# EAGLE board Nano_Qwiic_Shield-Panel (EAGLE 9.1.0), part 1 of 3
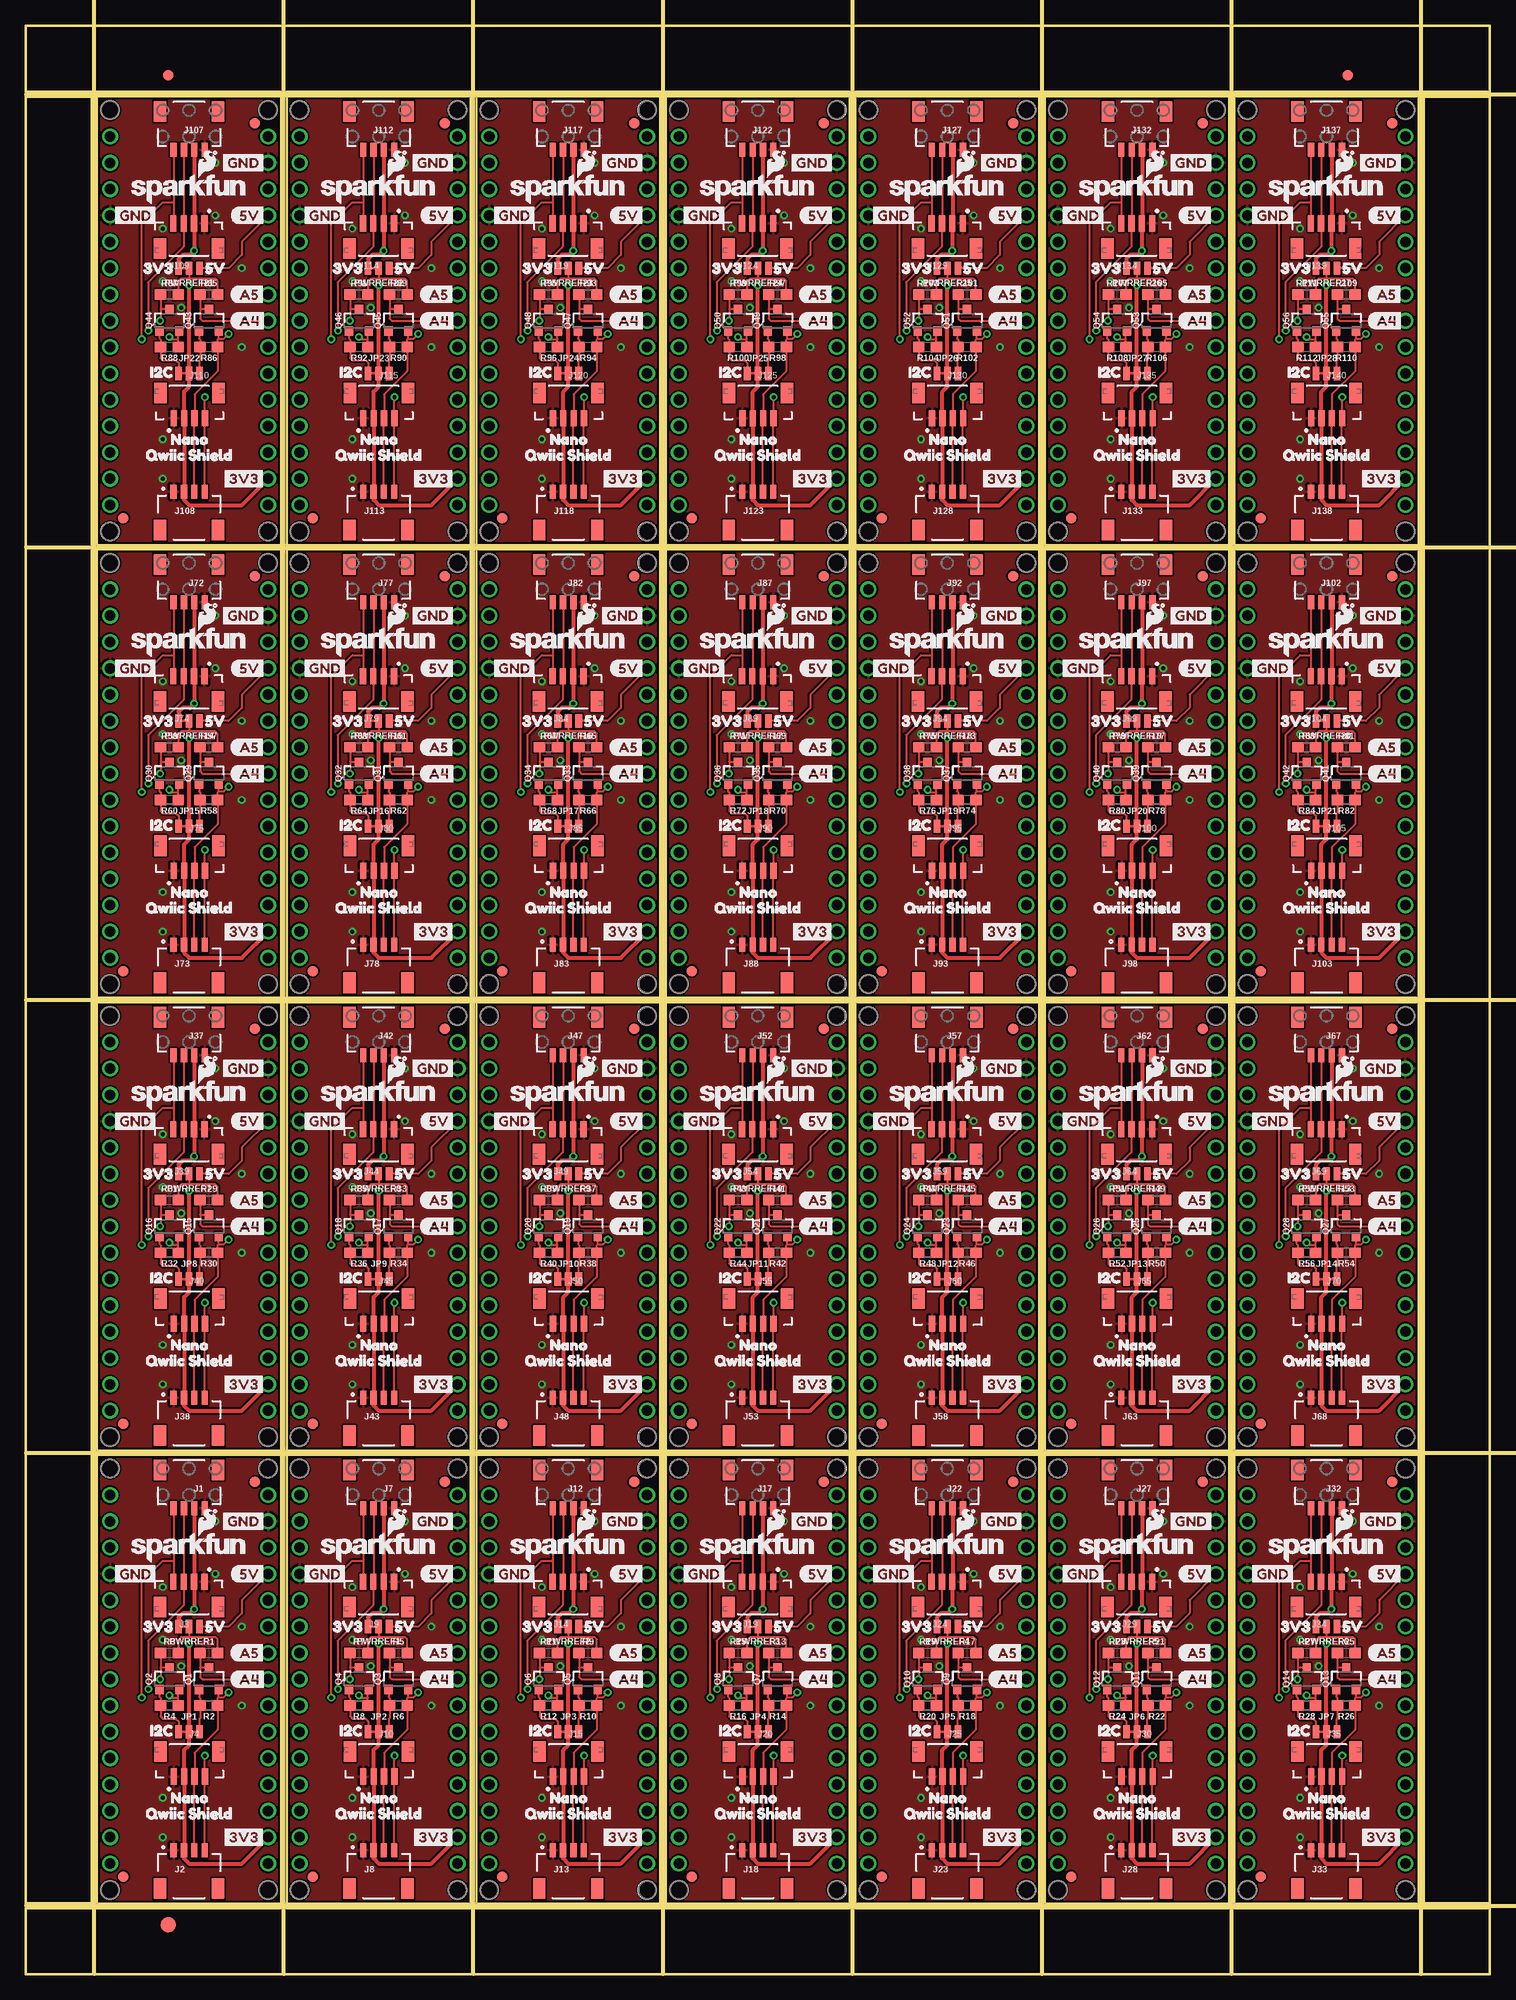
[diagram p0: board, top side]
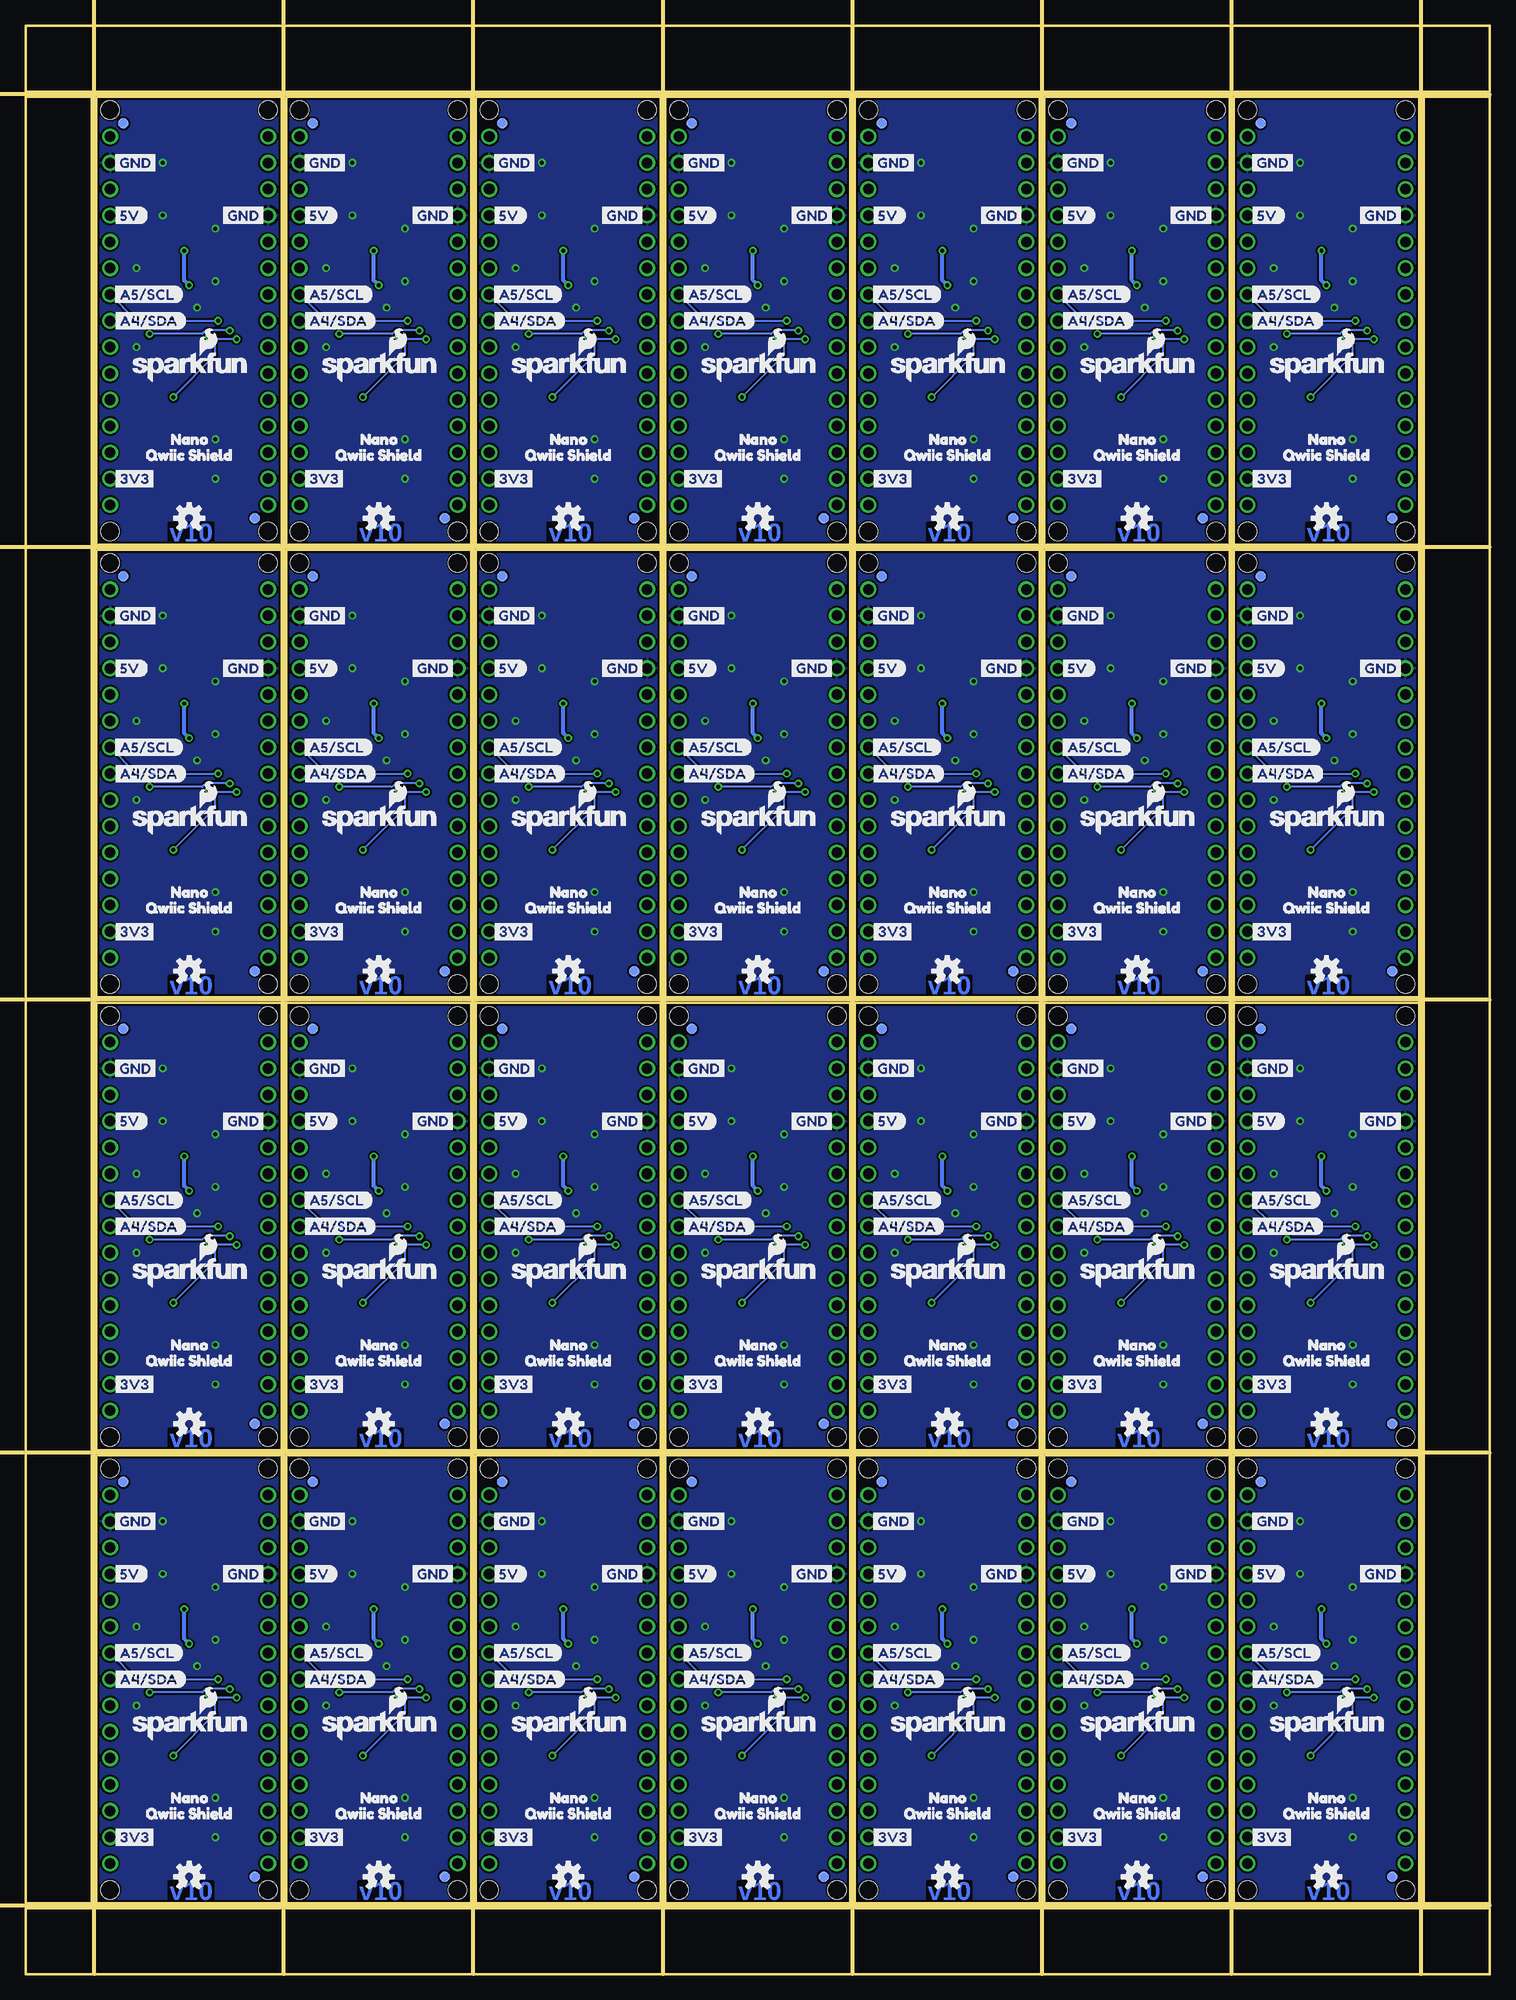
[diagram p1: board, bottom side, seen from below]

Size 141.22 x 187.96 mm. Coordinates in mm from the lower left corner, seen from the top.
Outline: 6.86,6.86 24.64,6.86 24.64,50.04 6.86,50.04 6.86,6.86
Outline: 25.15,6.86 42.93,6.86 42.93,50.04 25.15,50.04 25.15,6.86
Outline: 43.43,6.86 61.21,6.86 61.21,50.04 43.43,50.04 43.43,6.86
Outline: 61.72,6.86 79.5,6.86 79.5,50.04 61.72,50.04 61.72,6.86
Outline: 80.01,6.86 97.79,6.86 97.79,50.04 80.01,50.04 80.01,6.86
Outline: 98.3,6.86 116.08,6.86 116.08,50.04 98.3,50.04 98.3,6.86
Outline: 116.59,6.86 134.37,6.86 134.37,50.04 116.59,50.04 116.59,6.86
Outline: 6.86,50.55 24.64,50.55 24.64,93.73 6.86,93.73 6.86,50.55
Outline: 25.15,50.55 42.93,50.55 42.93,93.73 25.15,93.73 25.15,50.55
Outline: 43.43,50.55 61.21,50.55 61.21,93.73 43.43,93.73 43.43,50.55
Outline: 61.72,50.55 79.5,50.55 79.5,93.73 61.72,93.73 61.72,50.55
Outline: 80.01,50.55 97.79,50.55 97.79,93.73 80.01,93.73 80.01,50.55
Outline: 98.3,50.55 116.08,50.55 116.08,93.73 98.3,93.73 98.3,50.55
Outline: 116.59,50.55 134.37,50.55 134.37,93.73 116.59,93.73 116.59,50.55
Outline: 6.86,94.23 24.64,94.23 24.64,137.41 6.86,137.41 6.86,94.23
Outline: 25.15,94.23 42.93,94.23 42.93,137.41 25.15,137.41 25.15,94.23
Outline: 43.43,94.23 61.21,94.23 61.21,137.41 43.43,137.41 43.43,94.23
Outline: 61.72,94.23 79.5,94.23 79.5,137.41 61.72,137.41 61.72,94.23
Outline: 80.01,94.23 97.79,94.23 97.79,137.41 80.01,137.41 80.01,94.23
Outline: 98.3,94.23 116.08,94.23 116.08,137.41 98.3,137.41 98.3,94.23
Outline: 116.59,94.23 134.37,94.23 134.37,137.41 116.59,137.41 116.59,94.23
Outline: 6.86,137.92 24.64,137.92 24.64,181.1 6.86,181.1 6.86,137.92
Outline: 25.15,137.92 42.93,137.92 42.93,181.1 25.15,181.1 25.15,137.92
Outline: 43.43,137.92 61.21,137.92 61.21,181.1 43.43,181.1 43.43,137.92
Outline: 61.72,137.92 79.5,137.92 79.5,181.1 61.72,181.1 61.72,137.92
Outline: 80.01,137.92 97.79,137.92 97.79,181.1 80.01,181.1 80.01,137.92
Outline: 98.3,137.92 116.08,137.92 116.08,181.1 98.3,181.1 98.3,137.92
Outline: 116.59,137.92 134.37,137.92 134.37,181.1 116.59,181.1 116.59,137.92
Outline: 0,6.35 141.22,6.35 141.22,0 0,0 0,6.35
Outline: 134.87,181.1 141.22,181.1 141.22,6.86 134.87,6.86 134.87,181.1
Outline: 0,187.96 141.22,187.96 141.22,181.61 0,181.61 0,187.96
Outline: 0,181.1 6.35,181.1 6.35,6.86 0,6.86 0,181.1
Copper layers (1*16): Top 0.035mm / dielectric 1.5mm / Bottom 0.035mm
Design rules "SparkFun-2-layer-TIGHT": minimum track width 7mil, minimum drill 15mil, track to track 7mil, track to pad 7mil, pad to pad 7mil, via to via 7mil, smd to smd 7mil, copper to edge 7mil, drill to drill 7mil, minimum pad ring 7mil, minimum via ring 7mil, stop-mask expansion 4mil, vias tented up to drill 25mil, thermal gap 10mil
Holes 1.78 mm at 8.13,48.77 23.37,48.77 23.37,8.13 8.13,8.13 26.42,48.77 41.66,48.77 41.66,8.13 26.42,8.13 44.7,48.77 59.94,48.77 59.94,8.13 44.7,8.13 62.99,48.77 78.23,48.77 78.23,8.13 62.99,8.13 81.28,48.77 96.52,48.77 96.52,8.13 81.28,8.13 99.57,48.77 114.81,48.77 114.81,8.13 99.57,8.13 117.86,48.77 133.1,48.77 133.1,8.13 117.86,8.13 8.13,92.46 23.37,92.46 23.37,51.82 8.13,51.82 26.42,92.46 41.66,92.46 41.66,51.82 26.42,51.82 44.7,92.46 59.94,92.46 59.94,51.82 44.7,51.82 62.99,92.46 78.23,92.46 78.23,51.82 62.99,51.82 81.28,92.46 96.52,92.46 96.52,51.82 81.28,51.82 99.57,92.46 114.81,92.46 114.81,51.82 99.57,51.82 117.86,92.46 133.1,92.46 133.1,51.82 117.86,51.82 8.13,136.14 23.37,136.14 23.37,95.5 8.13,95.5 26.42,136.14 41.66,136.14 41.66,95.5 26.42,95.5 44.7,136.14 59.94,136.14 59.94,95.5 44.7,95.5 62.99,136.14 78.23,136.14 78.23,95.5 62.99,95.5 81.28,136.14 96.52,136.14 96.52,95.5 81.28,95.5 99.57,136.14 114.81,136.14 114.81,95.5 99.57,95.5 117.86,136.14 133.1,136.14 133.1,95.5 117.86,95.5 8.13,179.83 23.37,179.83 23.37,139.19 8.13,139.19 26.42,179.83 41.66,179.83 41.66,139.19 26.42,139.19 44.7,179.83 59.94,179.83 59.94,139.19 44.7,139.19 62.99,179.83 78.23,179.83 78.23,139.19 62.99,139.19 81.28,179.83 96.52,179.83 96.52,139.19 81.28,139.19 99.57,179.83 114.81,179.83 114.81,139.19 99.57,139.19 117.86,179.83 133.1,179.83 133.1,139.19 117.86,139.19
Milling: 13 lines

## Footprints (pad centres in the part's own frame; a part is rotated, then mirrored left to right if it is on the bottom)
FIDUCIAL-1X2 = smd 1 x 1: 1 0,0
FIDUCIAL-1.5X3 = smd 1.5 x 1.5: 1 0,0
JST04_1MM_RA = smd 0.6 x 1.35: 1 -1.5,0; 2 -0.5,0; 3 0.5,0; 4 1.5,0 | smd 1.2 x 2: NC1 2.8,-3.675; NC2 -2.8,-3.675
JST04_1MM_VERT = smd 0.6 x 1.55: 1 -1.478,0.775; 2 -0.478,0.775; 3 0.522,0.775; 4 1.522,0.775 | smd 1.2 x 2: NC1 -2.778,3.2; NC2 2.822,3.2
NANO = drill 1.016: 1 -7.62,17.78; 2 -7.62,15.24; 3 -7.62,12.7; 4 -7.62,10.16; 5 -7.62,7.62; 6 -7.62,5.08; 7 -7.62,2.54; 8 -7.62,0; 9 -7.62,-2.54; 10 -7.62,-5.08; 11 -7.62,-7.62; 12 -7.62,-10.16; 13 -7.62,-12.7; 14 -7.62,-15.24; 15 -7.62,-17.78; 16 7.62,-17.78; 17 7.62,-15.24; 18 7.62,-12.7; 19 7.62,-10.16; 20 7.62,-7.62; 21 7.62,-5.08; 22 7.62,-2.54; 23 7.62,0; 24 7.62,2.54; 25 7.62,5.08; 26 7.62,7.62; 27 7.62,10.16; 28 7.62,12.7; 29 7.62,15.24; 30 7.62,17.78
SMT-JUMPER_3_2-NC_TRACE_NO-SILK = smd 0.635 x 1.27: 1 -1.016,0; 2 0,0; 3 1.016,0
SMT-JUMPER_3_1-NC_TRACE_NO-SILK = smd 0.635 x 1.27: 1 -1.016,0; 2 0,0; 3 1.016,0
SOT23-3 = smd 0.8 x 0.9: 1 -0.95,-1; 2 0.95,-1; 3 0,1.1
0603 = smd 1.1 x 1: 1 -0.85,0; 2 0.85,0

## Placement (x,y rotation side)
E$1  [FIDUCIAL-1X2]  13.72,183.2 0 top
E$2  [FIDUCIAL-1X2]  127.51,183.2 0 top
E$3  [FIDUCIAL-1.5X3]  13.72,4.76 0 top
FD1  FIDUCIAL1X2  [FIDUCIAL-1X2]  9.4,9.4 0 top
FD2  FIDUCIAL1X2  [FIDUCIAL-1X2]  9.4,9.4 0 bottom
FD3  FIDUCIAL1X2  [FIDUCIAL-1X2]  22.1,47.5 0 top
FD4  FIDUCIAL1X2  [FIDUCIAL-1X2]  22.1,47.5 0 bottom
FD5  FIDUCIAL1X2  [FIDUCIAL-1X2]  27.69,9.4 0 top
FD6  FIDUCIAL1X2  [FIDUCIAL-1X2]  27.69,9.4 0 bottom
FD7  FIDUCIAL1X2  [FIDUCIAL-1X2]  40.39,47.5 0 top
FD8  FIDUCIAL1X2  [FIDUCIAL-1X2]  40.39,47.5 0 bottom
FD9  FIDUCIAL1X2  [FIDUCIAL-1X2]  45.97,9.4 0 top
FD10  FIDUCIAL1X2  [FIDUCIAL-1X2]  45.97,9.4 0 bottom
FD11  FIDUCIAL1X2  [FIDUCIAL-1X2]  58.67,47.5 0 top
FD12  FIDUCIAL1X2  [FIDUCIAL-1X2]  58.67,47.5 0 bottom
FD13  FIDUCIAL1X2  [FIDUCIAL-1X2]  64.26,9.4 0 top
FD14  FIDUCIAL1X2  [FIDUCIAL-1X2]  64.26,9.4 0 bottom
FD15  FIDUCIAL1X2  [FIDUCIAL-1X2]  76.96,47.5 0 top
FD16  FIDUCIAL1X2  [FIDUCIAL-1X2]  76.96,47.5 0 bottom
FD17  FIDUCIAL1X2  [FIDUCIAL-1X2]  82.55,9.4 0 top
FD18  FIDUCIAL1X2  [FIDUCIAL-1X2]  82.55,9.4 0 bottom
FD19  FIDUCIAL1X2  [FIDUCIAL-1X2]  95.25,47.5 0 top
FD20  FIDUCIAL1X2  [FIDUCIAL-1X2]  95.25,47.5 0 bottom
FD21  FIDUCIAL1X2  [FIDUCIAL-1X2]  100.84,9.4 0 top
FD22  FIDUCIAL1X2  [FIDUCIAL-1X2]  100.84,9.4 0 bottom
FD23  FIDUCIAL1X2  [FIDUCIAL-1X2]  113.54,47.5 0 top
FD24  FIDUCIAL1X2  [FIDUCIAL-1X2]  113.54,47.5 0 bottom
FD25  FIDUCIAL1X2  [FIDUCIAL-1X2]  119.13,9.4 0 top
FD26  FIDUCIAL1X2  [FIDUCIAL-1X2]  119.13,9.4 0 bottom
FD27  FIDUCIAL1X2  [FIDUCIAL-1X2]  131.83,47.5 0 top
FD28  FIDUCIAL1X2  [FIDUCIAL-1X2]  131.83,47.5 0 bottom
FD29  FIDUCIAL1X2  [FIDUCIAL-1X2]  9.4,53.09 0 top
FD30  FIDUCIAL1X2  [FIDUCIAL-1X2]  9.4,53.09 0 bottom
FD31  FIDUCIAL1X2  [FIDUCIAL-1X2]  22.1,91.19 0 top
FD32  FIDUCIAL1X2  [FIDUCIAL-1X2]  22.1,91.19 0 bottom
FD33  FIDUCIAL1X2  [FIDUCIAL-1X2]  27.69,53.09 0 top
FD34  FIDUCIAL1X2  [FIDUCIAL-1X2]  27.69,53.09 0 bottom
FD35  FIDUCIAL1X2  [FIDUCIAL-1X2]  40.39,91.19 0 top
FD36  FIDUCIAL1X2  [FIDUCIAL-1X2]  40.39,91.19 0 bottom
FD37  FIDUCIAL1X2  [FIDUCIAL-1X2]  45.97,53.09 0 top
FD38  FIDUCIAL1X2  [FIDUCIAL-1X2]  45.97,53.09 0 bottom
FD39  FIDUCIAL1X2  [FIDUCIAL-1X2]  58.67,91.19 0 top
FD40  FIDUCIAL1X2  [FIDUCIAL-1X2]  58.67,91.19 0 bottom
FD41  FIDUCIAL1X2  [FIDUCIAL-1X2]  64.26,53.09 0 top
FD42  FIDUCIAL1X2  [FIDUCIAL-1X2]  64.26,53.09 0 bottom
FD43  FIDUCIAL1X2  [FIDUCIAL-1X2]  76.96,91.19 0 top
FD44  FIDUCIAL1X2  [FIDUCIAL-1X2]  76.96,91.19 0 bottom
FD45  FIDUCIAL1X2  [FIDUCIAL-1X2]  82.55,53.09 0 top
FD46  FIDUCIAL1X2  [FIDUCIAL-1X2]  82.55,53.09 0 bottom
FD47  FIDUCIAL1X2  [FIDUCIAL-1X2]  95.25,91.19 0 top
FD48  FIDUCIAL1X2  [FIDUCIAL-1X2]  95.25,91.19 0 bottom
FD49  FIDUCIAL1X2  [FIDUCIAL-1X2]  100.84,53.09 0 top
FD50  FIDUCIAL1X2  [FIDUCIAL-1X2]  100.84,53.09 0 bottom
FD51  FIDUCIAL1X2  [FIDUCIAL-1X2]  113.54,91.19 0 top
FD52  FIDUCIAL1X2  [FIDUCIAL-1X2]  113.54,91.19 0 bottom
FD53  FIDUCIAL1X2  [FIDUCIAL-1X2]  119.13,53.09 0 top
FD54  FIDUCIAL1X2  [FIDUCIAL-1X2]  119.13,53.09 0 bottom
FD55  FIDUCIAL1X2  [FIDUCIAL-1X2]  131.83,91.19 0 top
FD56  FIDUCIAL1X2  [FIDUCIAL-1X2]  131.83,91.19 0 bottom
FD57  FIDUCIAL1X2  [FIDUCIAL-1X2]  9.4,96.77 0 top
FD58  FIDUCIAL1X2  [FIDUCIAL-1X2]  9.4,96.77 0 bottom
FD59  FIDUCIAL1X2  [FIDUCIAL-1X2]  22.1,134.87 0 top
FD60  FIDUCIAL1X2  [FIDUCIAL-1X2]  22.1,134.87 0 bottom
FD61  FIDUCIAL1X2  [FIDUCIAL-1X2]  27.69,96.77 0 top
FD62  FIDUCIAL1X2  [FIDUCIAL-1X2]  27.69,96.77 0 bottom
FD63  FIDUCIAL1X2  [FIDUCIAL-1X2]  40.39,134.87 0 top
FD64  FIDUCIAL1X2  [FIDUCIAL-1X2]  40.39,134.87 0 bottom
FD65  FIDUCIAL1X2  [FIDUCIAL-1X2]  45.97,96.77 0 top
FD66  FIDUCIAL1X2  [FIDUCIAL-1X2]  45.97,96.77 0 bottom
FD67  FIDUCIAL1X2  [FIDUCIAL-1X2]  58.67,134.87 0 top
FD68  FIDUCIAL1X2  [FIDUCIAL-1X2]  58.67,134.87 0 bottom
FD69  FIDUCIAL1X2  [FIDUCIAL-1X2]  64.26,96.77 0 top
FD70  FIDUCIAL1X2  [FIDUCIAL-1X2]  64.26,96.77 0 bottom
FD71  FIDUCIAL1X2  [FIDUCIAL-1X2]  76.96,134.87 0 top
FD72  FIDUCIAL1X2  [FIDUCIAL-1X2]  76.96,134.87 0 bottom
FD73  FIDUCIAL1X2  [FIDUCIAL-1X2]  82.55,96.77 0 top
FD74  FIDUCIAL1X2  [FIDUCIAL-1X2]  82.55,96.77 0 bottom
FD75  FIDUCIAL1X2  [FIDUCIAL-1X2]  95.25,134.87 0 top
FD76  FIDUCIAL1X2  [FIDUCIAL-1X2]  95.25,134.87 0 bottom
FD77  FIDUCIAL1X2  [FIDUCIAL-1X2]  100.84,96.77 0 top
FD78  FIDUCIAL1X2  [FIDUCIAL-1X2]  100.84,96.77 0 bottom
FD79  FIDUCIAL1X2  [FIDUCIAL-1X2]  113.54,134.87 0 top
FD80  FIDUCIAL1X2  [FIDUCIAL-1X2]  113.54,134.87 0 bottom
FD81  FIDUCIAL1X2  [FIDUCIAL-1X2]  119.13,96.77 0 top
FD82  FIDUCIAL1X2  [FIDUCIAL-1X2]  119.13,96.77 0 bottom
FD83  FIDUCIAL1X2  [FIDUCIAL-1X2]  131.83,134.87 0 top
FD84  FIDUCIAL1X2  [FIDUCIAL-1X2]  131.83,134.87 0 bottom
FD85  FIDUCIAL1X2  [FIDUCIAL-1X2]  9.4,140.46 0 top
FD86  FIDUCIAL1X2  [FIDUCIAL-1X2]  9.4,140.46 0 bottom
FD87  FIDUCIAL1X2  [FIDUCIAL-1X2]  22.1,178.56 0 top
FD88  FIDUCIAL1X2  [FIDUCIAL-1X2]  22.1,178.56 0 bottom
FD89  FIDUCIAL1X2  [FIDUCIAL-1X2]  27.69,140.46 0 top
FD90  FIDUCIAL1X2  [FIDUCIAL-1X2]  27.69,140.46 0 bottom
FD91  FIDUCIAL1X2  [FIDUCIAL-1X2]  40.39,178.56 0 top
FD92  FIDUCIAL1X2  [FIDUCIAL-1X2]  40.39,178.56 0 bottom
FD93  FIDUCIAL1X2  [FIDUCIAL-1X2]  45.97,140.46 0 top
FD94  FIDUCIAL1X2  [FIDUCIAL-1X2]  45.97,140.46 0 bottom
FD95  FIDUCIAL1X2  [FIDUCIAL-1X2]  58.67,178.56 0 top
FD96  FIDUCIAL1X2  [FIDUCIAL-1X2]  58.67,178.56 0 bottom
FD97  FIDUCIAL1X2  [FIDUCIAL-1X2]  64.26,140.46 0 top
FD98  FIDUCIAL1X2  [FIDUCIAL-1X2]  64.26,140.46 0 bottom
FD99  FIDUCIAL1X2  [FIDUCIAL-1X2]  76.96,178.56 0 top
FD100  FIDUCIAL1X2  [FIDUCIAL-1X2]  76.96,178.56 0 bottom
FD101  FIDUCIAL1X2  [FIDUCIAL-1X2]  82.55,140.46 0 top
FD102  FIDUCIAL1X2  [FIDUCIAL-1X2]  82.55,140.46 0 bottom
FD103  FIDUCIAL1X2  [FIDUCIAL-1X2]  95.25,178.56 0 top
FD104  FIDUCIAL1X2  [FIDUCIAL-1X2]  95.25,178.56 0 bottom
FD105  FIDUCIAL1X2  [FIDUCIAL-1X2]  100.84,140.46 0 top
FD106  FIDUCIAL1X2  [FIDUCIAL-1X2]  100.84,140.46 0 bottom
FD107  FIDUCIAL1X2  [FIDUCIAL-1X2]  113.54,178.56 0 top
FD108  FIDUCIAL1X2  [FIDUCIAL-1X2]  113.54,178.56 0 bottom
FD109  FIDUCIAL1X2  [FIDUCIAL-1X2]  119.13,140.46 0 top
FD110  FIDUCIAL1X2  [FIDUCIAL-1X2]  119.13,140.46 0 bottom
FD111  FIDUCIAL1X2  [FIDUCIAL-1X2]  131.83,178.56 0 top
FD112  FIDUCIAL1X2  [FIDUCIAL-1X2]  131.83,178.56 0 bottom
J1  QWIIC_RIGHT_ANGLE  [JST04_1MM_RA]  15.75,44.96 180 top
J2  QWIIC_RIGHT_ANGLE  [JST04_1MM_RA]  15.75,11.94 0 top
J3  Vertical Qwiic Connector  [JST04_1MM_VERT]  15.75,38.61 180 top
J4  Vertical Qwiic Connector  [JST04_1MM_VERT]  15.75,18.29 0 top
J5  NANO_FOOTPRINT  [NANO]  15.75,28.45 0 top
J6  NANO_FOOTPRINT  [NANO]  34.04,28.45 0 top
J7  QWIIC_RIGHT_ANGLE  [JST04_1MM_RA]  34.04,44.96 180 top
J8  QWIIC_RIGHT_ANGLE  [JST04_1MM_RA]  34.04,11.94 0 top
J9  Vertical Qwiic Connector  [JST04_1MM_VERT]  34.04,38.61 180 top
J10  Vertical Qwiic Connector  [JST04_1MM_VERT]  34.04,18.29 0 top
J11  NANO_FOOTPRINT  [NANO]  52.32,28.45 0 top
J12  QWIIC_RIGHT_ANGLE  [JST04_1MM_RA]  52.32,44.96 180 top
J13  QWIIC_RIGHT_ANGLE  [JST04_1MM_RA]  52.32,11.94 0 top
J14  Vertical Qwiic Connector  [JST04_1MM_VERT]  52.32,38.61 180 top
J15  Vertical Qwiic Connector  [JST04_1MM_VERT]  52.32,18.29 0 top
J16  NANO_FOOTPRINT  [NANO]  70.61,28.45 0 top
J17  QWIIC_RIGHT_ANGLE  [JST04_1MM_RA]  70.61,44.96 180 top
J18  QWIIC_RIGHT_ANGLE  [JST04_1MM_RA]  70.61,11.94 0 top
J19  Vertical Qwiic Connector  [JST04_1MM_VERT]  70.61,38.61 180 top
J20  Vertical Qwiic Connector  [JST04_1MM_VERT]  70.61,18.29 0 top
J21  NANO_FOOTPRINT  [NANO]  88.9,28.45 0 top
J22  QWIIC_RIGHT_ANGLE  [JST04_1MM_RA]  88.9,44.96 180 top
J23  QWIIC_RIGHT_ANGLE  [JST04_1MM_RA]  88.9,11.94 0 top
J24  Vertical Qwiic Connector  [JST04_1MM_VERT]  88.9,38.61 180 top
J25  Vertical Qwiic Connector  [JST04_1MM_VERT]  88.9,18.29 0 top
J26  NANO_FOOTPRINT  [NANO]  107.19,28.45 0 top
J27  QWIIC_RIGHT_ANGLE  [JST04_1MM_RA]  107.19,44.96 180 top
J28  QWIIC_RIGHT_ANGLE  [JST04_1MM_RA]  107.19,11.94 0 top
J29  Vertical Qwiic Connector  [JST04_1MM_VERT]  107.19,38.61 180 top
J30  Vertical Qwiic Connector  [JST04_1MM_VERT]  107.19,18.29 0 top
J31  NANO_FOOTPRINT  [NANO]  125.48,28.45 0 top
J32  QWIIC_RIGHT_ANGLE  [JST04_1MM_RA]  125.48,44.96 180 top
J33  QWIIC_RIGHT_ANGLE  [JST04_1MM_RA]  125.48,11.94 0 top
J34  Vertical Qwiic Connector  [JST04_1MM_VERT]  125.48,38.61 180 top
J35  Vertical Qwiic Connector  [JST04_1MM_VERT]  125.48,18.29 0 top
J36  NANO_FOOTPRINT  [NANO]  15.75,72.14 0 top
J37  QWIIC_RIGHT_ANGLE  [JST04_1MM_RA]  15.75,88.65 180 top
J38  QWIIC_RIGHT_ANGLE  [JST04_1MM_RA]  15.75,55.63 0 top
J39  Vertical Qwiic Connector  [JST04_1MM_VERT]  15.75,82.3 180 top
J40  Vertical Qwiic Connector  [JST04_1MM_VERT]  15.75,61.98 0 top
J41  NANO_FOOTPRINT  [NANO]  34.04,72.14 0 top
J42  QWIIC_RIGHT_ANGLE  [JST04_1MM_RA]  34.04,88.65 180 top
J43  QWIIC_RIGHT_ANGLE  [JST04_1MM_RA]  34.04,55.63 0 top
J44  Vertical Qwiic Connector  [JST04_1MM_VERT]  34.04,82.3 180 top
J45  Vertical Qwiic Connector  [JST04_1MM_VERT]  34.04,61.98 0 top
J46  NANO_FOOTPRINT  [NANO]  52.32,72.14 0 top
J47  QWIIC_RIGHT_ANGLE  [JST04_1MM_RA]  52.32,88.65 180 top
J48  QWIIC_RIGHT_ANGLE  [JST04_1MM_RA]  52.32,55.63 0 top
J49  Vertical Qwiic Connector  [JST04_1MM_VERT]  52.32,82.3 180 top
J50  Vertical Qwiic Connector  [JST04_1MM_VERT]  52.32,61.98 0 top
J51  NANO_FOOTPRINT  [NANO]  70.61,72.14 0 top
J52  QWIIC_RIGHT_ANGLE  [JST04_1MM_RA]  70.61,88.65 180 top
J53  QWIIC_RIGHT_ANGLE  [JST04_1MM_RA]  70.61,55.63 0 top
J54  Vertical Qwiic Connector  [JST04_1MM_VERT]  70.61,82.3 180 top
J55  Vertical Qwiic Connector  [JST04_1MM_VERT]  70.61,61.98 0 top
J56  NANO_FOOTPRINT  [NANO]  88.9,72.14 0 top
J57  QWIIC_RIGHT_ANGLE  [JST04_1MM_RA]  88.9,88.65 180 top
J58  QWIIC_RIGHT_ANGLE  [JST04_1MM_RA]  88.9,55.63 0 top
J59  Vertical Qwiic Connector  [JST04_1MM_VERT]  88.9,82.3 180 top
J60  Vertical Qwiic Connector  [JST04_1MM_VERT]  88.9,61.98 0 top
J61  NANO_FOOTPRINT  [NANO]  107.19,72.14 0 top
J62  QWIIC_RIGHT_ANGLE  [JST04_1MM_RA]  107.19,88.65 180 top
J63  QWIIC_RIGHT_ANGLE  [JST04_1MM_RA]  107.19,55.63 0 top
J64  Vertical Qwiic Connector  [JST04_1MM_VERT]  107.19,82.3 180 top
J65  Vertical Qwiic Connector  [JST04_1MM_VERT]  107.19,61.98 0 top
J66  NANO_FOOTPRINT  [NANO]  125.48,72.14 0 top
J67  QWIIC_RIGHT_ANGLE  [JST04_1MM_RA]  125.48,88.65 180 top
J68  QWIIC_RIGHT_ANGLE  [JST04_1MM_RA]  125.48,55.63 0 top
J69  Vertical Qwiic Connector  [JST04_1MM_VERT]  125.48,82.3 180 top
J70  Vertical Qwiic Connector  [JST04_1MM_VERT]  125.48,61.98 0 top
J71  NANO_FOOTPRINT  [NANO]  15.75,115.82 0 top
J72  QWIIC_RIGHT_ANGLE  [JST04_1MM_RA]  15.75,132.33 180 top
J73  QWIIC_RIGHT_ANGLE  [JST04_1MM_RA]  15.75,99.31 0 top
J74  Vertical Qwiic Connector  [JST04_1MM_VERT]  15.75,125.98 180 top
J75  Vertical Qwiic Connector  [JST04_1MM_VERT]  15.75,105.66 0 top
J76  NANO_FOOTPRINT  [NANO]  34.04,115.82 0 top
J77  QWIIC_RIGHT_ANGLE  [JST04_1MM_RA]  34.04,132.33 180 top
J78  QWIIC_RIGHT_ANGLE  [JST04_1MM_RA]  34.04,99.31 0 top
J79  Vertical Qwiic Connector  [JST04_1MM_VERT]  34.04,125.98 180 top
J80  Vertical Qwiic Connector  [JST04_1MM_VERT]  34.04,105.66 0 top
J81  NANO_FOOTPRINT  [NANO]  52.32,115.82 0 top
J82  QWIIC_RIGHT_ANGLE  [JST04_1MM_RA]  52.32,132.33 180 top
J83  QWIIC_RIGHT_ANGLE  [JST04_1MM_RA]  52.32,99.31 0 top
J84  Vertical Qwiic Connector  [JST04_1MM_VERT]  52.32,125.98 180 top
J85  Vertical Qwiic Connector  [JST04_1MM_VERT]  52.32,105.66 0 top
J86  NANO_FOOTPRINT  [NANO]  70.61,115.82 0 top
J87  QWIIC_RIGHT_ANGLE  [JST04_1MM_RA]  70.61,132.33 180 top
J88  QWIIC_RIGHT_ANGLE  [JST04_1MM_RA]  70.61,99.31 0 top
J89  Vertical Qwiic Connector  [JST04_1MM_VERT]  70.61,125.98 180 top
J90  Vertical Qwiic Connector  [JST04_1MM_VERT]  70.61,105.66 0 top
J91  NANO_FOOTPRINT  [NANO]  88.9,115.82 0 top
J92  QWIIC_RIGHT_ANGLE  [JST04_1MM_RA]  88.9,132.33 180 top
J93  QWIIC_RIGHT_ANGLE  [JST04_1MM_RA]  88.9,99.31 0 top
J94  Vertical Qwiic Connector  [JST04_1MM_VERT]  88.9,125.98 180 top
J95  Vertical Qwiic Connector  [JST04_1MM_VERT]  88.9,105.66 0 top
J96  NANO_FOOTPRINT  [NANO]  107.19,115.82 0 top
J97  QWIIC_RIGHT_ANGLE  [JST04_1MM_RA]  107.19,132.33 180 top
J98  QWIIC_RIGHT_ANGLE  [JST04_1MM_RA]  107.19,99.31 0 top
J99  Vertical Qwiic Connector  [JST04_1MM_VERT]  107.19,125.98 180 top
J100  Vertical Qwiic Connector  [JST04_1MM_VERT]  107.19,105.66 0 top
J101  NANO_FOOTPRINT  [NANO]  125.48,115.82 0 top
J102  QWIIC_RIGHT_ANGLE  [JST04_1MM_RA]  125.48,132.33 180 top
J103  QWIIC_RIGHT_ANGLE  [JST04_1MM_RA]  125.48,99.31 0 top
J104  Vertical Qwiic Connector  [JST04_1MM_VERT]  125.48,125.98 180 top
J105  Vertical Qwiic Connector  [JST04_1MM_VERT]  125.48,105.66 0 top
J106  NANO_FOOTPRINT  [NANO]  15.75,159.51 0 top
J107  QWIIC_RIGHT_ANGLE  [JST04_1MM_RA]  15.75,176.02 180 top
J108  QWIIC_RIGHT_ANGLE  [JST04_1MM_RA]  15.75,143 0 top
J109  Vertical Qwiic Connector  [JST04_1MM_VERT]  15.75,169.67 180 top
J110  Vertical Qwiic Connector  [JST04_1MM_VERT]  15.75,149.35 0 top
J111  NANO_FOOTPRINT  [NANO]  34.04,159.51 0 top
J112  QWIIC_RIGHT_ANGLE  [JST04_1MM_RA]  34.04,176.02 180 top
J113  QWIIC_RIGHT_ANGLE  [JST04_1MM_RA]  34.04,143 0 top
J114  Vertical Qwiic Connector  [JST04_1MM_VERT]  34.04,169.67 180 top
J115  Vertical Qwiic Connector  [JST04_1MM_VERT]  34.04,149.35 0 top
J116  NANO_FOOTPRINT  [NANO]  52.32,159.51 0 top
J117  QWIIC_RIGHT_ANGLE  [JST04_1MM_RA]  52.32,176.02 180 top
J118  QWIIC_RIGHT_ANGLE  [JST04_1MM_RA]  52.32,143 0 top
J119  Vertical Qwiic Connector  [JST04_1MM_VERT]  52.32,169.67 180 top
J120  Vertical Qwiic Connector  [JST04_1MM_VERT]  52.32,149.35 0 top
J121  NANO_FOOTPRINT  [NANO]  70.61,159.51 0 top
J122  QWIIC_RIGHT_ANGLE  [JST04_1MM_RA]  70.61,176.02 180 top
J123  QWIIC_RIGHT_ANGLE  [JST04_1MM_RA]  70.61,143 0 top
J124  Vertical Qwiic Connector  [JST04_1MM_VERT]  70.61,169.67 180 top
J125  Vertical Qwiic Connector  [JST04_1MM_VERT]  70.61,149.35 0 top
J126  NANO_FOOTPRINT  [NANO]  88.9,159.51 0 top
J127  QWIIC_RIGHT_ANGLE  [JST04_1MM_RA]  88.9,176.02 180 top
J128  QWIIC_RIGHT_ANGLE  [JST04_1MM_RA]  88.9,143 0 top
J129  Vertical Qwiic Connector  [JST04_1MM_VERT]  88.9,169.67 180 top
J130  Vertical Qwiic Connector  [JST04_1MM_VERT]  88.9,149.35 0 top
J131  NANO_FOOTPRINT  [NANO]  107.19,159.51 0 top
J132  QWIIC_RIGHT_ANGLE  [JST04_1MM_RA]  107.19,176.02 180 top
J133  QWIIC_RIGHT_ANGLE  [JST04_1MM_RA]  107.19,143 0 top
J134  Vertical Qwiic Connector  [JST04_1MM_VERT]  107.19,169.67 180 top
J135  Vertical Qwiic Connector  [JST04_1MM_VERT]  107.19,149.35 0 top
J136  NANO_FOOTPRINT  [NANO]  125.48,159.51 0 top
J137  QWIIC_RIGHT_ANGLE  [JST04_1MM_RA]  125.48,176.02 180 top
J138  QWIIC_RIGHT_ANGLE  [JST04_1MM_RA]  125.48,143 0 top
J139  Vertical Qwiic Connector  [JST04_1MM_VERT]  125.48,169.67 180 top
J140  Vertical Qwiic Connector  [JST04_1MM_VERT]  125.48,149.35 0 top
JP1  JUMPER-SMT_3_2-NC_TRACE_NO-SILK  [SMT-JUMPER_3_2-NC_TRACE_NO-SILK]  15.75,23.37 0 top
JP2  JUMPER-SMT_3_2-NC_TRACE_NO-SILK  [SMT-JUMPER_3_2-NC_TRACE_NO-SILK]  34.04,23.37 0 top
JP3  JUMPER-SMT_3_2-NC_TRACE_NO-SILK  [SMT-JUMPER_3_2-NC_TRACE_NO-SILK]  52.32,23.37 0 top
JP4  JUMPER-SMT_3_2-NC_TRACE_NO-SILK  [SMT-JUMPER_3_2-NC_TRACE_NO-SILK]  70.61,23.37 0 top
JP5  JUMPER-SMT_3_2-NC_TRACE_NO-SILK  [SMT-JUMPER_3_2-NC_TRACE_NO-SILK]  88.9,23.37 0 top
JP6  JUMPER-SMT_3_2-NC_TRACE_NO-SILK  [SMT-JUMPER_3_2-NC_TRACE_NO-SILK]  107.19,23.37 0 top
JP7  JUMPER-SMT_3_2-NC_TRACE_NO-SILK  [SMT-JUMPER_3_2-NC_TRACE_NO-SILK]  125.48,23.37 0 top
JP8  JUMPER-SMT_3_2-NC_TRACE_NO-SILK  [SMT-JUMPER_3_2-NC_TRACE_NO-SILK]  15.75,67.06 0 top
JP9  JUMPER-SMT_3_2-NC_TRACE_NO-SILK  [SMT-JUMPER_3_2-NC_TRACE_NO-SILK]  34.04,67.06 0 top
JP10  JUMPER-SMT_3_2-NC_TRACE_NO-SILK  [SMT-JUMPER_3_2-NC_TRACE_NO-SILK]  52.32,67.06 0 top
JP11  JUMPER-SMT_3_2-NC_TRACE_NO-SILK  [SMT-JUMPER_3_2-NC_TRACE_NO-SILK]  70.61,67.06 0 top
JP12  JUMPER-SMT_3_2-NC_TRACE_NO-SILK  [SMT-JUMPER_3_2-NC_TRACE_NO-SILK]  88.9,67.06 0 top
JP13  JUMPER-SMT_3_2-NC_TRACE_NO-SILK  [SMT-JUMPER_3_2-NC_TRACE_NO-SILK]  107.19,67.06 0 top
JP14  JUMPER-SMT_3_2-NC_TRACE_NO-SILK  [SMT-JUMPER_3_2-NC_TRACE_NO-SILK]  125.48,67.06 0 top
JP15  JUMPER-SMT_3_2-NC_TRACE_NO-SILK  [SMT-JUMPER_3_2-NC_TRACE_NO-SILK]  15.75,110.74 0 top
JP16  JUMPER-SMT_3_2-NC_TRACE_NO-SILK  [SMT-JUMPER_3_2-NC_TRACE_NO-SILK]  34.04,110.74 0 top
JP17  JUMPER-SMT_3_2-NC_TRACE_NO-SILK  [SMT-JUMPER_3_2-NC_TRACE_NO-SILK]  52.32,110.74 0 top
JP18  JUMPER-SMT_3_2-NC_TRACE_NO-SILK  [SMT-JUMPER_3_2-NC_TRACE_NO-SILK]  70.61,110.74 0 top
JP19  JUMPER-SMT_3_2-NC_TRACE_NO-SILK  [SMT-JUMPER_3_2-NC_TRACE_NO-SILK]  88.9,110.74 0 top
JP20  JUMPER-SMT_3_2-NC_TRACE_NO-SILK  [SMT-JUMPER_3_2-NC_TRACE_NO-SILK]  107.19,110.74 0 top
JP21  JUMPER-SMT_3_2-NC_TRACE_NO-SILK  [SMT-JUMPER_3_2-NC_TRACE_NO-SILK]  125.48,110.74 0 top
JP22  JUMPER-SMT_3_2-NC_TRACE_NO-SILK  [SMT-JUMPER_3_2-NC_TRACE_NO-SILK]  15.75,154.43 0 top
JP23  JUMPER-SMT_3_2-NC_TRACE_NO-SILK  [SMT-JUMPER_3_2-NC_TRACE_NO-SILK]  34.04,154.43 0 top
JP24  JUMPER-SMT_3_2-NC_TRACE_NO-SILK  [SMT-JUMPER_3_2-NC_TRACE_NO-SILK]  52.32,154.43 0 top
JP25  JUMPER-SMT_3_2-NC_TRACE_NO-SILK  [SMT-JUMPER_3_2-NC_TRACE_NO-SILK]  70.61,154.43 0 top
JP26  JUMPER-SMT_3_2-NC_TRACE_NO-SILK  [SMT-JUMPER_3_2-NC_TRACE_NO-SILK]  88.9,154.43 0 top
JP27  JUMPER-SMT_3_2-NC_TRACE_NO-SILK  [SMT-JUMPER_3_2-NC_TRACE_NO-SILK]  107.19,154.43 0 top
JP28  JUMPER-SMT_3_2-NC_TRACE_NO-SILK  [SMT-JUMPER_3_2-NC_TRACE_NO-SILK]  125.48,154.43 0 top
LOGO1  OSHW-LOGOS  [OSHW-LOGO-S]  15.75,9.4 0 bottom
LOGO2  SFE_LOGO_NAME_FLAME.1_INCH  [SFE_LOGO_NAME_FLAME_.1]  15.75,41.15 0 top
LOGO3  SFE_LOGO_NAME_FLAME.1_INCH  [SFE_LOGO_NAME_FLAME_.1]  15.62,24 0 bottom
LOGO4  OSHW-LOGOS  [OSHW-LOGO-S]  34.04,9.4 0 bottom
LOGO5  SFE_LOGO_NAME_FLAME.1_INCH  [SFE_LOGO_NAME_FLAME_.1]  34.04,41.15 0 top
LOGO6  SFE_LOGO_NAME_FLAME.1_INCH  [SFE_LOGO_NAME_FLAME_.1]  33.91,24 0 bottom
LOGO7  OSHW-LOGOS  [OSHW-LOGO-S]  52.32,9.4 0 bottom
LOGO8  SFE_LOGO_NAME_FLAME.1_INCH  [SFE_LOGO_NAME_FLAME_.1]  52.32,41.15 0 top
LOGO9  SFE_LOGO_NAME_FLAME.1_INCH  [SFE_LOGO_NAME_FLAME_.1]  52.2,24 0 bottom
LOGO10  OSHW-LOGOS  [OSHW-LOGO-S]  70.61,9.4 0 bottom
LOGO11  SFE_LOGO_NAME_FLAME.1_INCH  [SFE_LOGO_NAME_FLAME_.1]  70.61,41.15 0 top
LOGO12  SFE_LOGO_NAME_FLAME.1_INCH  [SFE_LOGO_NAME_FLAME_.1]  70.48,24 0 bottom
LOGO13  OSHW-LOGOS  [OSHW-LOGO-S]  88.9,9.4 0 bottom
LOGO14  SFE_LOGO_NAME_FLAME.1_INCH  [SFE_LOGO_NAME_FLAME_.1]  88.9,41.15 0 top
LOGO15  SFE_LOGO_NAME_FLAME.1_INCH  [SFE_LOGO_NAME_FLAME_.1]  88.77,24 0 bottom
LOGO16  OSHW-LOGOS  [OSHW-LOGO-S]  107.19,9.4 0 bottom
LOGO17  SFE_LOGO_NAME_FLAME.1_INCH  [SFE_LOGO_NAME_FLAME_.1]  107.19,41.15 0 top
LOGO18  SFE_LOGO_NAME_FLAME.1_INCH  [SFE_LOGO_NAME_FLAME_.1]  107.06,24 0 bottom
LOGO19  OSHW-LOGOS  [OSHW-LOGO-S]  125.48,9.4 0 bottom
LOGO20  SFE_LOGO_NAME_FLAME.1_INCH  [SFE_LOGO_NAME_FLAME_.1]  125.48,41.15 0 top
LOGO21  SFE_LOGO_NAME_FLAME.1_INCH  [SFE_LOGO_NAME_FLAME_.1]  125.35,24 0 bottom
LOGO22  OSHW-LOGOS  [OSHW-LOGO-S]  15.75,53.09 0 bottom
LOGO23  SFE_LOGO_NAME_FLAME.1_INCH  [SFE_LOGO_NAME_FLAME_.1]  15.75,84.84 0 top
LOGO24  SFE_LOGO_NAME_FLAME.1_INCH  [SFE_LOGO_NAME_FLAME_.1]  15.62,67.69 0 bottom
LOGO25  OSHW-LOGOS  [OSHW-LOGO-S]  34.04,53.09 0 bottom
LOGO26  SFE_LOGO_NAME_FLAME.1_INCH  [SFE_LOGO_NAME_FLAME_.1]  34.04,84.84 0 top
LOGO27  SFE_LOGO_NAME_FLAME.1_INCH  [SFE_LOGO_NAME_FLAME_.1]  33.91,67.69 0 bottom
LOGO28  OSHW-LOGOS  [OSHW-LOGO-S]  52.32,53.09 0 bottom
LOGO29  SFE_LOGO_NAME_FLAME.1_INCH  [SFE_LOGO_NAME_FLAME_.1]  52.32,84.84 0 top
LOGO30  SFE_LOGO_NAME_FLAME.1_INCH  [SFE_LOGO_NAME_FLAME_.1]  52.2,67.69 0 bottom
LOGO31  OSHW-LOGOS  [OSHW-LOGO-S]  70.61,53.09 0 bottom
LOGO32  SFE_LOGO_NAME_FLAME.1_INCH  [SFE_LOGO_NAME_FLAME_.1]  70.61,84.84 0 top
LOGO33  SFE_LOGO_NAME_FLAME.1_INCH  [SFE_LOGO_NAME_FLAME_.1]  70.48,67.69 0 bottom
LOGO34  OSHW-LOGOS  [OSHW-LOGO-S]  88.9,53.09 0 bottom
LOGO35  SFE_LOGO_NAME_FLAME.1_INCH  [SFE_LOGO_NAME_FLAME_.1]  88.9,84.84 0 top
LOGO36  SFE_LOGO_NAME_FLAME.1_INCH  [SFE_LOGO_NAME_FLAME_.1]  88.77,67.69 0 bottom
LOGO37  OSHW-LOGOS  [OSHW-LOGO-S]  107.19,53.09 0 bottom
LOGO38  SFE_LOGO_NAME_FLAME.1_INCH  [SFE_LOGO_NAME_FLAME_.1]  107.19,84.84 0 top
LOGO39  SFE_LOGO_NAME_FLAME.1_INCH  [SFE_LOGO_NAME_FLAME_.1]  107.06,67.69 0 bottom
LOGO40  OSHW-LOGOS  [OSHW-LOGO-S]  125.48,53.09 0 bottom
LOGO41  SFE_LOGO_NAME_FLAME.1_INCH  [SFE_LOGO_NAME_FLAME_.1]  125.48,84.84 0 top
LOGO42  SFE_LOGO_NAME_FLAME.1_INCH  [SFE_LOGO_NAME_FLAME_.1]  125.35,67.69 0 bottom
LOGO43  OSHW-LOGOS  [OSHW-LOGO-S]  15.75,96.77 0 bottom
LOGO44  SFE_LOGO_NAME_FLAME.1_INCH  [SFE_LOGO_NAME_FLAME_.1]  15.75,128.52 0 top
LOGO45  SFE_LOGO_NAME_FLAME.1_INCH  [SFE_LOGO_NAME_FLAME_.1]  15.62,111.38 0 bottom
LOGO46  OSHW-LOGOS  [OSHW-LOGO-S]  34.04,96.77 0 bottom
LOGO47  SFE_LOGO_NAME_FLAME.1_INCH  [SFE_LOGO_NAME_FLAME_.1]  34.04,128.52 0 top
LOGO48  SFE_LOGO_NAME_FLAME.1_INCH  [SFE_LOGO_NAME_FLAME_.1]  33.91,111.38 0 bottom
LOGO49  OSHW-LOGOS  [OSHW-LOGO-S]  52.32,96.77 0 bottom
LOGO50  SFE_LOGO_NAME_FLAME.1_INCH  [SFE_LOGO_NAME_FLAME_.1]  52.32,128.52 0 top
LOGO51  SFE_LOGO_NAME_FLAME.1_INCH  [SFE_LOGO_NAME_FLAME_.1]  52.2,111.38 0 bottom
LOGO52  OSHW-LOGOS  [OSHW-LOGO-S]  70.61,96.77 0 bottom
LOGO53  SFE_LOGO_NAME_FLAME.1_INCH  [SFE_LOGO_NAME_FLAME_.1]  70.61,128.52 0 top
LOGO54  SFE_LOGO_NAME_FLAME.1_INCH  [SFE_LOGO_NAME_FLAME_.1]  70.48,111.38 0 bottom
LOGO55  OSHW-LOGOS  [OSHW-LOGO-S]  88.9,96.77 0 bottom
LOGO56  SFE_LOGO_NAME_FLAME.1_INCH  [SFE_LOGO_NAME_FLAME_.1]  88.9,128.52 0 top
LOGO57  SFE_LOGO_NAME_FLAME.1_INCH  [SFE_LOGO_NAME_FLAME_.1]  88.77,111.38 0 bottom
LOGO58  OSHW-LOGOS  [OSHW-LOGO-S]  107.19,96.77 0 bottom
LOGO59  SFE_LOGO_NAME_FLAME.1_INCH  [SFE_LOGO_NAME_FLAME_.1]  107.19,128.52 0 top
LOGO60  SFE_LOGO_NAME_FLAME.1_INCH  [SFE_LOGO_NAME_FLAME_.1]  107.06,111.38 0 bottom
LOGO61  OSHW-LOGOS  [OSHW-LOGO-S]  125.48,96.77 0 bottom
LOGO62  SFE_LOGO_NAME_FLAME.1_INCH  [SFE_LOGO_NAME_FLAME_.1]  125.48,128.52 0 top
LOGO63  SFE_LOGO_NAME_FLAME.1_INCH  [SFE_LOGO_NAME_FLAME_.1]  125.35,111.38 0 bottom
LOGO64  OSHW-LOGOS  [OSHW-LOGO-S]  15.75,140.46 0 bottom
LOGO65  SFE_LOGO_NAME_FLAME.1_INCH  [SFE_LOGO_NAME_FLAME_.1]  15.75,172.21 0 top
LOGO66  SFE_LOGO_NAME_FLAME.1_INCH  [SFE_LOGO_NAME_FLAME_.1]  15.62,155.07 0 bottom
LOGO67  OSHW-LOGOS  [OSHW-LOGO-S]  34.04,140.46 0 bottom
LOGO68  SFE_LOGO_NAME_FLAME.1_INCH  [SFE_LOGO_NAME_FLAME_.1]  34.04,172.21 0 top
LOGO69  SFE_LOGO_NAME_FLAME.1_INCH  [SFE_LOGO_NAME_FLAME_.1]  33.91,155.07 0 bottom
LOGO70  OSHW-LOGOS  [OSHW-LOGO-S]  52.32,140.46 0 bottom
LOGO71  SFE_LOGO_NAME_FLAME.1_INCH  [SFE_LOGO_NAME_FLAME_.1]  52.32,172.21 0 top
LOGO72  SFE_LOGO_NAME_FLAME.1_INCH  [SFE_LOGO_NAME_FLAME_.1]  52.2,155.07 0 bottom
LOGO73  OSHW-LOGOS  [OSHW-LOGO-S]  70.61,140.46 0 bottom
LOGO74  SFE_LOGO_NAME_FLAME.1_INCH  [SFE_LOGO_NAME_FLAME_.1]  70.61,172.21 0 top
LOGO75  SFE_LOGO_NAME_FLAME.1_INCH  [SFE_LOGO_NAME_FLAME_.1]  70.48,155.07 0 bottom
LOGO76  OSHW-LOGOS  [OSHW-LOGO-S]  88.9,140.46 0 bottom
LOGO77  SFE_LOGO_NAME_FLAME.1_INCH  [SFE_LOGO_NAME_FLAME_.1]  88.9,172.21 0 top
LOGO78  SFE_LOGO_NAME_FLAME.1_INCH  [SFE_LOGO_NAME_FLAME_.1]  88.77,155.07 0 bottom
LOGO79  OSHW-LOGOS  [OSHW-LOGO-S]  107.19,140.46 0 bottom
LOGO80  SFE_LOGO_NAME_FLAME.1_INCH  [SFE_LOGO_NAME_FLAME_.1]  107.19,172.21 0 top
LOGO81  SFE_LOGO_NAME_FLAME.1_INCH  [SFE_LOGO_NAME_FLAME_.1]  107.06,155.07 0 bottom
LOGO82  OSHW-LOGOS  [OSHW-LOGO-S]  125.48,140.46 0 bottom
LOGO83  SFE_LOGO_NAME_FLAME.1_INCH  [SFE_LOGO_NAME_FLAME_.1]  125.48,172.21 0 top
LOGO84  SFE_LOGO_NAME_FLAME.1_INCH  [SFE_LOGO_NAME_FLAME_.1]  125.35,155.07 0 bottom
PWRREF  JUMPER-SMT_3_1-NC_TRACE_NO-SILK  [SMT-JUMPER_3_1-NC_TRACE_NO-SILK]  15.75,33.53 180 top
PWRREF1  JUMPER-SMT_3_1-NC_TRACE_NO-SILK  [SMT-JUMPER_3_1-NC_TRACE_NO-SILK]  34.04,33.53 180 top
PWRREF2  JUMPER-SMT_3_1-NC_TRACE_NO-SILK  [SMT-JUMPER_3_1-NC_TRACE_NO-SILK]  52.32,33.53 180 top
PWRREF3  JUMPER-SMT_3_1-NC_TRACE_NO-SILK  [SMT-JUMPER_3_1-NC_TRACE_NO-SILK]  70.61,33.53 180 top
PWRREF4  JUMPER-SMT_3_1-NC_TRACE_NO-SILK  [SMT-JUMPER_3_1-NC_TRACE_NO-SILK]  88.9,33.53 180 top
PWRREF5  JUMPER-SMT_3_1-NC_TRACE_NO-SILK  [SMT-JUMPER_3_1-NC_TRACE_NO-SILK]  107.19,33.53 180 top
PWRREF6  JUMPER-SMT_3_1-NC_TRACE_NO-SILK  [SMT-JUMPER_3_1-NC_TRACE_NO-SILK]  125.48,33.53 180 top
PWRREF7  JUMPER-SMT_3_1-NC_TRACE_NO-SILK  [SMT-JUMPER_3_1-NC_TRACE_NO-SILK]  15.75,77.22 180 top
PWRREF8  JUMPER-SMT_3_1-NC_TRACE_NO-SILK  [SMT-JUMPER_3_1-NC_TRACE_NO-SILK]  34.04,77.22 180 top
PWRREF9  JUMPER-SMT_3_1-NC_TRACE_NO-SILK  [SMT-JUMPER_3_1-NC_TRACE_NO-SILK]  52.32,77.22 180 top
PWRREF10  JUMPER-SMT_3_1-NC_TRACE_NO-SILK  [SMT-JUMPER_3_1-NC_TRACE_NO-SILK]  70.61,77.22 180 top
PWRREF11  JUMPER-SMT_3_1-NC_TRACE_NO-SILK  [SMT-JUMPER_3_1-NC_TRACE_NO-SILK]  88.9,77.22 180 top
PWRREF12  JUMPER-SMT_3_1-NC_TRACE_NO-SILK  [SMT-JUMPER_3_1-NC_TRACE_NO-SILK]  107.19,77.22 180 top
PWRREF13  JUMPER-SMT_3_1-NC_TRACE_NO-SILK  [SMT-JUMPER_3_1-NC_TRACE_NO-SILK]  125.48,77.22 180 top
PWRREF14  JUMPER-SMT_3_1-NC_TRACE_NO-SILK  [SMT-JUMPER_3_1-NC_TRACE_NO-SILK]  15.75,120.9 180 top
PWRREF15  JUMPER-SMT_3_1-NC_TRACE_NO-SILK  [SMT-JUMPER_3_1-NC_TRACE_NO-SILK]  34.04,120.9 180 top
PWRREF16  JUMPER-SMT_3_1-NC_TRACE_NO-SILK  [SMT-JUMPER_3_1-NC_TRACE_NO-SILK]  52.32,120.9 180 top
PWRREF17  JUMPER-SMT_3_1-NC_TRACE_NO-SILK  [SMT-JUMPER_3_1-NC_TRACE_NO-SILK]  70.61,120.9 180 top
PWRREF18  JUMPER-SMT_3_1-NC_TRACE_NO-SILK  [SMT-JUMPER_3_1-NC_TRACE_NO-SILK]  88.9,120.9 180 top
PWRREF19  JUMPER-SMT_3_1-NC_TRACE_NO-SILK  [SMT-JUMPER_3_1-NC_TRACE_NO-SILK]  107.19,120.9 180 top
PWRREF20  JUMPER-SMT_3_1-NC_TRACE_NO-SILK  [SMT-JUMPER_3_1-NC_TRACE_NO-SILK]  125.48,120.9 180 top
PWRREF21  JUMPER-SMT_3_1-NC_TRACE_NO-SILK  [SMT-JUMPER_3_1-NC_TRACE_NO-SILK]  15.75,164.59 180 top
PWRREF22  JUMPER-SMT_3_1-NC_TRACE_NO-SILK  [SMT-JUMPER_3_1-NC_TRACE_NO-SILK]  34.04,164.59 180 top
PWRREF23  JUMPER-SMT_3_1-NC_TRACE_NO-SILK  [SMT-JUMPER_3_1-NC_TRACE_NO-SILK]  52.32,164.59 180 top
PWRREF24  JUMPER-SMT_3_1-NC_TRACE_NO-SILK  [SMT-JUMPER_3_1-NC_TRACE_NO-SILK]  70.61,164.59 180 top
PWRREF25  JUMPER-SMT_3_1-NC_TRACE_NO-SILK  [SMT-JUMPER_3_1-NC_TRACE_NO-SILK]  88.9,164.59 180 top
PWRREF26  JUMPER-SMT_3_1-NC_TRACE_NO-SILK  [SMT-JUMPER_3_1-NC_TRACE_NO-SILK]  107.19,164.59 180 top
PWRREF27  JUMPER-SMT_3_1-NC_TRACE_NO-SILK  [SMT-JUMPER_3_1-NC_TRACE_NO-SILK]  125.48,164.59 180 top
Q1  220mA/50V/3.5Ω  [SOT23-3]  17.65,28.45 0 top
Q2  220mA/50V/3.5Ω  [SOT23-3]  13.84,28.45 0 top
Q3  220mA/50V/3.5Ω  [SOT23-3]  35.94,28.45 0 top
Q4  220mA/50V/3.5Ω  [SOT23-3]  32.13,28.45 0 top
Q5  220mA/50V/3.5Ω  [SOT23-3]  54.23,28.45 0 top
Q6  220mA/50V/3.5Ω  [SOT23-3]  50.42,28.45 0 top
Q7  220mA/50V/3.5Ω  [SOT23-3]  72.52,28.45 0 top
Q8  220mA/50V/3.5Ω  [SOT23-3]  68.71,28.45 0 top
Q9  220mA/50V/3.5Ω  [SOT23-3]  90.81,28.45 0 top
Q10  220mA/50V/3.5Ω  [SOT23-3]  87,28.45 0 top
Q11  220mA/50V/3.5Ω  [SOT23-3]  109.09,28.45 0 top
Q12  220mA/50V/3.5Ω  [SOT23-3]  105.28,28.45 0 top
Q13  220mA/50V/3.5Ω  [SOT23-3]  127.38,28.45 0 top
Q14  220mA/50V/3.5Ω  [SOT23-3]  123.57,28.45 0 top
Q15  220mA/50V/3.5Ω  [SOT23-3]  17.65,72.14 0 top
Q16  220mA/50V/3.5Ω  [SOT23-3]  13.84,72.14 0 top
Q17  220mA/50V/3.5Ω  [SOT23-3]  35.94,72.14 0 top
Q18  220mA/50V/3.5Ω  [SOT23-3]  32.13,72.14 0 top
Q19  220mA/50V/3.5Ω  [SOT23-3]  54.23,72.14 0 top
Q20  220mA/50V/3.5Ω  [SOT23-3]  50.42,72.14 0 top
Q21  220mA/50V/3.5Ω  [SOT23-3]  72.52,72.14 0 top
Q22  220mA/50V/3.5Ω  [SOT23-3]  68.71,72.14 0 top
Q23  220mA/50V/3.5Ω  [SOT23-3]  90.81,72.14 0 top
Q24  220mA/50V/3.5Ω  [SOT23-3]  87,72.14 0 top
Q25  220mA/50V/3.5Ω  [SOT23-3]  109.09,72.14 0 top
Q26  220mA/50V/3.5Ω  [SOT23-3]  105.28,72.14 0 top
Q27  220mA/50V/3.5Ω  [SOT23-3]  127.38,72.14 0 top
Q28  220mA/50V/3.5Ω  [SOT23-3]  123.57,72.14 0 top
Q29  220mA/50V/3.5Ω  [SOT23-3]  17.65,115.82 0 top
Q30  220mA/50V/3.5Ω  [SOT23-3]  13.84,115.82 0 top
Q31  220mA/50V/3.5Ω  [SOT23-3]  35.94,115.82 0 top
Q32  220mA/50V/3.5Ω  [SOT23-3]  32.13,115.82 0 top
Q33  220mA/50V/3.5Ω  [SOT23-3]  54.23,115.82 0 top
Q34  220mA/50V/3.5Ω  [SOT23-3]  50.42,115.82 0 top
Q35  220mA/50V/3.5Ω  [SOT23-3]  72.52,115.82 0 top
Q36  220mA/50V/3.5Ω  [SOT23-3]  68.71,115.82 0 top
Q37  220mA/50V/3.5Ω  [SOT23-3]  90.81,115.82 0 top
Q38  220mA/50V/3.5Ω  [SOT23-3]  87,115.82 0 top
Q39  220mA/50V/3.5Ω  [SOT23-3]  109.09,115.82 0 top
Q40  220mA/50V/3.5Ω  [SOT23-3]  105.28,115.82 0 top
Q41  220mA/50V/3.5Ω  [SOT23-3]  127.38,115.82 0 top
Q42  220mA/50V/3.5Ω  [SOT23-3]  123.57,115.82 0 top
Q43  220mA/50V/3.5Ω  [SOT23-3]  17.65,159.51 0 top
Q44  220mA/50V/3.5Ω  [SOT23-3]  13.84,159.51 0 top
Q45  220mA/50V/3.5Ω  [SOT23-3]  35.94,159.51 0 top
Q46  220mA/50V/3.5Ω  [SOT23-3]  32.13,159.51 0 top
Q47  220mA/50V/3.5Ω  [SOT23-3]  54.23,159.51 0 top
Q48  220mA/50V/3.5Ω  [SOT23-3]  50.42,159.51 0 top
Q49  220mA/50V/3.5Ω  [SOT23-3]  72.52,159.51 0 top
Q50  220mA/50V/3.5Ω  [SOT23-3]  68.71,159.51 0 top
Q51  220mA/50V/3.5Ω  [SOT23-3]  90.81,159.51 0 top
Q52  220mA/50V/3.5Ω  [SOT23-3]  87,159.51 0 top
Q53  220mA/50V/3.5Ω  [SOT23-3]  109.09,159.51 0 top
Q54  220mA/50V/3.5Ω  [SOT23-3]  105.28,159.51 0 top
Q55  220mA/50V/3.5Ω  [SOT23-3]  127.38,159.51 0 top
Q56  220mA/50V/3.5Ω  [SOT23-3]  123.57,159.51 0 top
R1  4.7k  [0603]  17.65,30.99 0 top
R2  4.7k  [0603]  17.65,25.91 180 top
R3  4.7k  [0603]  13.84,30.99 0 top
R4  4.7k  [0603]  13.84,25.91 180 top
R5  4.7k  [0603]  35.94,30.99 0 top
R6  4.7k  [0603]  35.94,25.91 180 top
R7  4.7k  [0603]  32.13,30.99 0 top
R8  4.7k  [0603]  32.13,25.91 180 top
R9  4.7k  [0603]  54.23,30.99 0 top
R10  4.7k  [0603]  54.23,25.91 180 top
R11  4.7k  [0603]  50.42,30.99 0 top
R12  4.7k  [0603]  50.42,25.91 180 top
R13  4.7k  [0603]  72.52,30.99 0 top
R14  4.7k  [0603]  72.52,25.91 180 top
R15  4.7k  [0603]  68.71,30.99 0 top
R16  4.7k  [0603]  68.71,25.91 180 top
R17  4.7k  [0603]  90.81,30.99 0 top
R18  4.7k  [0603]  90.81,25.91 180 top
R19  4.7k  [0603]  87,30.99 0 top
R20  4.7k  [0603]  87,25.91 180 top
R21  4.7k  [0603]  109.09,30.99 0 top
R22  4.7k  [0603]  109.09,25.91 180 top
R23  4.7k  [0603]  105.28,30.99 0 top
R24  4.7k  [0603]  105.28,25.91 180 top
R25  4.7k  [0603]  127.38,30.99 0 top
R26  4.7k  [0603]  127.38,25.91 180 top
R27  4.7k  [0603]  123.57,30.99 0 top
R28  4.7k  [0603]  123.57,25.91 180 top
R29  4.7k  [0603]  17.65,74.68 0 top
R30  4.7k  [0603]  17.65,69.6 180 top
R31  4.7k  [0603]  13.84,74.68 0 top
R32  4.7k  [0603]  13.84,69.6 180 top
R33  4.7k  [0603]  35.94,74.68 0 top
R34  4.7k  [0603]  35.94,69.6 180 top
R35  4.7k  [0603]  32.13,74.68 0 top
R36  4.7k  [0603]  32.13,69.6 180 top
R37  4.7k  [0603]  54.23,74.68 0 top
R38  4.7k  [0603]  54.23,69.6 180 top
R39  4.7k  [0603]  50.42,74.68 0 top
R40  4.7k  [0603]  50.42,69.6 180 top
R41  4.7k  [0603]  72.52,74.68 0 top
R42  4.7k  [0603]  72.52,69.6 180 top
R43  4.7k  [0603]  68.71,74.68 0 top
R44  4.7k  [0603]  68.71,69.6 180 top
R45  4.7k  [0603]  90.81,74.68 0 top
R46  4.7k  [0603]  90.81,69.6 180 top
R47  4.7k  [0603]  87,74.68 0 top
R48  4.7k  [0603]  87,69.6 180 top
R49  4.7k  [0603]  109.09,74.68 0 top
R50  4.7k  [0603]  109.09,69.6 180 top
R51  4.7k  [0603]  105.28,74.68 0 top
R52  4.7k  [0603]  105.28,69.6 180 top
R53  4.7k  [0603]  127.38,74.68 0 top
R54  4.7k  [0603]  127.38,69.6 180 top
R55  4.7k  [0603]  123.57,74.68 0 top
R56  4.7k  [0603]  123.57,69.6 180 top
R57  4.7k  [0603]  17.65,118.36 0 top
R58  4.7k  [0603]  17.65,113.28 180 top
R59  4.7k  [0603]  13.84,118.36 0 top
R60  4.7k  [0603]  13.84,113.28 180 top
R61  4.7k  [0603]  35.94,118.36 0 top
R62  4.7k  [0603]  35.94,113.28 180 top
R63  4.7k  [0603]  32.13,118.36 0 top
R64  4.7k  [0603]  32.13,113.28 180 top
R65  4.7k  [0603]  54.23,118.36 0 top
R66  4.7k  [0603]  54.23,113.28 180 top
R67  4.7k  [0603]  50.42,118.36 0 top
R68  4.7k  [0603]  50.42,113.28 180 top
R69  4.7k  [0603]  72.52,118.36 0 top
R70  4.7k  [0603]  72.52,113.28 180 top
R71  4.7k  [0603]  68.71,118.36 0 top
R72  4.7k  [0603]  68.71,113.28 180 top
R73  4.7k  [0603]  90.81,118.36 0 top
R74  4.7k  [0603]  90.81,113.28 180 top
R75  4.7k  [0603]  87,118.36 0 top
R76  4.7k  [0603]  87,113.28 180 top
R77  4.7k  [0603]  109.09,118.36 0 top
R78  4.7k  [0603]  109.09,113.28 180 top
R79  4.7k  [0603]  105.28,118.36 0 top
R80  4.7k  [0603]  105.28,113.28 180 top
R81  4.7k  [0603]  127.38,118.36 0 top
R82  4.7k  [0603]  127.38,113.28 180 top
R83  4.7k  [0603]  123.57,118.36 0 top
R84  4.7k  [0603]  123.57,113.28 180 top
R85  4.7k  [0603]  17.65,162.05 0 top
R86  4.7k  [0603]  17.65,156.97 180 top
R87  4.7k  [0603]  13.84,162.05 0 top
R88  4.7k  [0603]  13.84,156.97 180 top
R89  4.7k  [0603]  35.94,162.05 0 top
R90  4.7k  [0603]  35.94,156.97 180 top
R91  4.7k  [0603]  32.13,162.05 0 top
R92  4.7k  [0603]  32.13,156.97 180 top
R93  4.7k  [0603]  54.23,162.05 0 top
R94  4.7k  [0603]  54.23,156.97 180 top
R95  4.7k  [0603]  50.42,162.05 0 top
R96  4.7k  [0603]  50.42,156.97 180 top
R97  4.7k  [0603]  72.52,162.05 0 top
R98  4.7k  [0603]  72.52,156.97 180 top
R99  4.7k  [0603]  68.71,162.05 0 top
R100  4.7k  [0603]  68.71,156.97 180 top
R101  4.7k  [0603]  90.81,162.05 0 top
R102  4.7k  [0603]  90.81,156.97 180 top
R103  4.7k  [0603]  87,162.05 0 top
R104  4.7k  [0603]  87,156.97 180 top
R105  4.7k  [0603]  109.09,162.05 0 top
R106  4.7k  [0603]  109.09,156.97 180 top
R107  4.7k  [0603]  105.28,162.05 0 top
R108  4.7k  [0603]  105.28,156.97 180 top
R109  4.7k  [0603]  127.38,162.05 0 top
R110  4.7k  [0603]  127.38,156.97 180 top
R111  4.7k  [0603]  123.57,162.05 0 top
R112  4.7k  [0603]  123.57,156.97 180 top
U$1  [QWIIC_SHIELD1]  10.67,15.49 0 top
U$2  [NANO1]  13.08,17.02 0 top
U$3  [A4#SDA5]  23.37,28.45 0 bottom
U$4  [A5#SCL4]  23.37,30.99 0 bottom
U$5  [GND0]  8.13,38.61 0 top
U$6  [GND0]  18.54,43.69 0 top
U$7  [GND0]  23.37,43.69 0 bottom
U$8  [GND0]  12.95,38.61 0 bottom
U$9  [A45]  19.68,28.45 0 top
U$10  [A56]  19.68,30.99 0 top
U$11  [I2C6]  11.05,23.5 0 top
U$12  [3V36]  18.67,13.21 0 top
U$13  [3V36]  23.37,13.21 0 bottom
U$14  [NANO1]  18.41,17.02 0 bottom
U$15  [QWIIC_SHIELD1]  20.83,15.49 0 bottom
U$16  [3V31]  10.41,33.53 0 top
U$17  [5V0]  16.38,33.53 0 top
U$18  [5V0]  23.37,38.61 0 bottom
U$19  [5V1]  19.68,38.61 0 top
U$20  [QWIIC_SHIELD1]  28.96,15.49 0 top
U$21  [NANO1]  31.37,17.02 0 top
U$22  [A4#SDA5]  41.66,28.45 0 bottom
U$23  [A5#SCL4]  41.66,30.99 0 bottom
U$24  [GND0]  26.42,38.61 0 top
U$25  [GND0]  36.83,43.69 0 top
U$26  [GND0]  41.66,43.69 0 bottom
U$27  [GND0]  31.24,38.61 0 bottom
U$28  [A45]  37.97,28.45 0 top
U$29  [A56]  37.97,30.99 0 top
U$30  [I2C6]  29.34,23.5 0 top
U$31  [3V36]  36.96,13.21 0 top
U$32  [3V36]  41.66,13.21 0 bottom
U$33  [NANO1]  36.7,17.02 0 bottom
U$34  [QWIIC_SHIELD1]  39.12,15.49 0 bottom
U$35  [3V31]  28.7,33.53 0 top
U$36  [5V0]  34.67,33.53 0 top
U$37  [5V0]  41.66,38.61 0 bottom
U$38  [5V1]  37.97,38.61 0 top
U$39  [QWIIC_SHIELD1]  47.24,15.49 0 top
U$40  [NANO1]  49.66,17.02 0 top
U$41  [A4#SDA5]  59.94,28.45 0 bottom
U$42  [A5#SCL4]  59.94,30.99 0 bottom
U$43  [GND0]  44.7,38.61 0 top
U$44  [GND0]  55.12,43.69 0 top
U$45  [GND0]  59.94,43.69 0 bottom
U$46  [GND0]  49.53,38.61 0 bottom
U$47  [A45]  56.26,28.45 0 top
U$48  [A56]  56.26,30.99 0 top
U$49  [I2C6]  47.62,23.5 0 top
U$50  [3V36]  55.24,13.21 0 top
U$51  [3V36]  59.94,13.21 0 bottom
U$52  [NANO1]  54.99,17.02 0 bottom
U$53  [QWIIC_SHIELD1]  57.4,15.49 0 bottom
U$54  [3V31]  46.99,33.53 0 top
U$55  [5V0]  52.96,33.53 0 top
U$56  [5V0]  59.94,38.61 0 bottom
U$57  [5V1]  56.26,38.61 0 top
U$58  [QWIIC_SHIELD1]  65.53,15.49 0 top
U$59  [NANO1]  67.95,17.02 0 top
U$60  [A4#SDA5]  78.23,28.45 0 bottom
U$61  [A5#SCL4]  78.23,30.99 0 bottom
U$62  [GND0]  62.99,38.61 0 top
U$63  [GND0]  73.41,43.69 0 top
U$64  [GND0]  78.23,43.69 0 bottom
U$65  [GND0]  67.82,38.61 0 bottom
U$66  [A45]  74.55,28.45 0 top
U$67  [A56]  74.55,30.99 0 top
U$68  [I2C6]  65.91,23.5 0 top
U$69  [3V36]  73.53,13.21 0 top
U$70  [3V36]  78.23,13.21 0 bottom
U$71  [NANO1]  73.28,17.02 0 bottom
U$72  [QWIIC_SHIELD1]  75.69,15.49 0 bottom
U$73  [3V31]  65.28,33.53 0 top
U$74  [5V0]  71.25,33.53 0 top
U$75  [5V0]  78.23,38.61 0 bottom
U$76  [5V1]  74.55,38.61 0 top
U$77  [QWIIC_SHIELD1]  83.82,15.49 0 top
U$78  [NANO1]  86.23,17.02 0 top
U$79  [A4#SDA5]  96.52,28.45 0 bottom
U$80  [A5#SCL4]  96.52,30.99 0 bottom
U$81  [GND0]  81.28,38.61 0 top
U$82  [GND0]  91.69,43.69 0 top
U$83  [GND0]  96.52,43.69 0 bottom
U$84  [GND0]  86.11,38.61 0 bottom
U$85  [A45]  92.84,28.45 0 top
U$86  [A56]  92.84,30.99 0 top
U$87  [I2C6]  84.2,23.5 0 top
U$88  [3V36]  91.82,13.21 0 top
U$89  [3V36]  96.52,13.21 0 bottom
U$90  [NANO1]  91.57,17.02 0 bottom
U$91  [QWIIC_SHIELD1]  93.98,15.49 0 bottom
U$92  [3V31]  83.57,33.53 0 top
U$93  [5V0]  89.54,33.53 0 top
U$94  [5V0]  96.52,38.61 0 bottom
U$95  [5V1]  92.84,38.61 0 top
U$96  [QWIIC_SHIELD1]  102.11,15.49 0 top
U$97  [NANO1]  104.52,17.02 0 top
U$98  [A4#SDA5]  114.81,28.45 0 bottom
U$99  [A5#SCL4]  114.81,30.99 0 bottom
U$100  [GND0]  99.57,38.61 0 top
U$101  [GND0]  109.98,43.69 0 top
U$102  [GND0]  114.81,43.69 0 bottom
U$103  [GND0]  104.39,38.61 0 bottom
U$104  [A45]  111.12,28.45 0 top
U$105  [A56]  111.12,30.99 0 top
U$106  [I2C6]  102.49,23.5 0 top
U$107  [3V36]  110.11,13.21 0 top
U$108  [3V36]  114.81,13.21 0 bottom
U$109  [NANO1]  109.86,17.02 0 bottom
U$110  [QWIIC_SHIELD1]  112.27,15.49 0 bottom
U$111  [3V31]  101.85,33.53 0 top
U$112  [5V0]  107.82,33.53 0 top
U$113  [5V0]  114.81,38.61 0 bottom
U$114  [5V1]  111.12,38.61 0 top
U$115  [QWIIC_SHIELD1]  120.4,15.49 0 top
U$116  [NANO1]  122.81,17.02 0 top
U$117  [A4#SDA5]  133.1,28.45 0 bottom
U$118  [A5#SCL4]  133.1,30.99 0 bottom
U$119  [GND0]  117.86,38.61 0 top
U$120  [GND0]  128.27,43.69 0 top
U$121  [GND0]  133.1,43.69 0 bottom
U$122  [GND0]  122.68,38.61 0 bottom
U$123  [A45]  129.41,28.45 0 top
U$124  [A56]  129.41,30.99 0 top
U$125  [I2C6]  120.78,23.5 0 top
U$126  [3V36]  128.4,13.21 0 top
U$127  [3V36]  133.1,13.21 0 bottom
U$128  [NANO1]  128.14,17.02 0 bottom
U$129  [QWIIC_SHIELD1]  130.56,15.49 0 bottom
U$130  [3V31]  120.14,33.53 0 top
U$131  [5V0]  126.11,33.53 0 top
U$132  [5V0]  133.1,38.61 0 bottom
U$133  [5V1]  129.41,38.61 0 top
U$134  [QWIIC_SHIELD1]  10.67,59.18 0 top
U$135  [NANO1]  13.08,60.71 0 top
U$136  [A4#SDA5]  23.37,72.14 0 bottom
U$137  [A5#SCL4]  23.37,74.68 0 bottom
U$138  [GND0]  8.13,82.3 0 top
U$139  [GND0]  18.54,87.38 0 top
U$140  [GND0]  23.37,87.38 0 bottom
U$141  [GND0]  12.95,82.3 0 bottom
U$142  [A45]  19.68,72.14 0 top
U$143  [A56]  19.68,74.68 0 top
U$144  [I2C6]  11.05,67.18 0 top
U$145  [3V36]  18.67,56.9 0 top
U$146  [3V36]  23.37,56.9 0 bottom
U$147  [NANO1]  18.41,60.71 0 bottom
U$148  [QWIIC_SHIELD1]  20.83,59.18 0 bottom
U$149  [3V31]  10.41,77.22 0 top
U$150  [5V0]  16.38,77.22 0 top
U$151  [5V0]  23.37,82.3 0 bottom
U$152  [5V1]  19.68,82.3 0 top
U$153  [QWIIC_SHIELD1]  28.96,59.18 0 top
U$154  [NANO1]  31.37,60.71 0 top
U$155  [A4#SDA5]  41.66,72.14 0 bottom
U$156  [A5#SCL4]  41.66,74.68 0 bottom
U$157  [GND0]  26.42,82.3 0 top
U$158  [GND0]  36.83,87.38 0 top
U$159  [GND0]  41.66,87.38 0 bottom
U$160  [GND0]  31.24,82.3 0 bottom
U$161  [A45]  37.97,72.14 0 top
U$162  [A56]  37.97,74.68 0 top
U$163  [I2C6]  29.34,67.18 0 top
U$164  [3V36]  36.96,56.9 0 top
U$165  [3V36]  41.66,56.9 0 bottom
U$166  [NANO1]  36.7,60.71 0 bottom
U$167  [QWIIC_SHIELD1]  39.12,59.18 0 bottom
U$168  [3V31]  28.7,77.22 0 top
U$169  [5V0]  34.67,77.22 0 top
U$170  [5V0]  41.66,82.3 0 bottom
U$171  [5V1]  37.97,82.3 0 top
U$172  [QWIIC_SHIELD1]  47.24,59.18 0 top
U$173  [NANO1]  49.66,60.71 0 top
U$174  [A4#SDA5]  59.94,72.14 0 bottom
U$175  [A5#SCL4]  59.94,74.68 0 bottom
U$176  [GND0]  44.7,82.3 0 top
U$177  [GND0]  55.12,87.38 0 top
U$178  [GND0]  59.94,87.38 0 bottom
U$179  [GND0]  49.53,82.3 0 bottom
U$180  [A45]  56.26,72.14 0 top
U$181  [A56]  56.26,74.68 0 top
U$182  [I2C6]  47.62,67.18 0 top
U$183  [3V36]  55.24,56.9 0 top
U$184  [3V36]  59.94,56.9 0 bottom
U$185  [NANO1]  54.99,60.71 0 bottom
U$186  [QWIIC_SHIELD1]  57.4,59.18 0 bottom
U$187  [3V31]  46.99,77.22 0 top
U$188  [5V0]  52.96,77.22 0 top
U$189  [5V0]  59.94,82.3 0 bottom
U$190  [5V1]  56.26,82.3 0 top
U$191  [QWIIC_SHIELD1]  65.53,59.18 0 top
U$192  [NANO1]  67.95,60.71 0 top
U$193  [A4#SDA5]  78.23,72.14 0 bottom
U$194  [A5#SCL4]  78.23,74.68 0 bottom
U$195  [GND0]  62.99,82.3 0 top
U$196  [GND0]  73.41,87.38 0 top
U$197  [GND0]  78.23,87.38 0 bottom
U$198  [GND0]  67.82,82.3 0 bottom
U$199  [A45]  74.55,72.14 0 top
U$200  [A56]  74.55,74.68 0 top
U$201  [I2C6]  65.91,67.18 0 top
U$202  [3V36]  73.53,56.9 0 top
U$203  [3V36]  78.23,56.9 0 bottom
U$204  [NANO1]  73.28,60.71 0 bottom
U$205  [QWIIC_SHIELD1]  75.69,59.18 0 bottom
U$206  [3V31]  65.28,77.22 0 top
U$207  [5V0]  71.25,77.22 0 top
U$208  [5V0]  78.23,82.3 0 bottom
U$209  [5V1]  74.55,82.3 0 top
U$210  [QWIIC_SHIELD1]  83.82,59.18 0 top
U$211  [NANO1]  86.23,60.71 0 top
U$212  [A4#SDA5]  96.52,72.14 0 bottom
U$213  [A5#SCL4]  96.52,74.68 0 bottom
U$214  [GND0]  81.28,82.3 0 top
U$215  [GND0]  91.69,87.38 0 top
U$216  [GND0]  96.52,87.38 0 bottom
U$217  [GND0]  86.11,82.3 0 bottom
U$218  [A45]  92.84,72.14 0 top
U$219  [A56]  92.84,74.68 0 top
U$220  [I2C6]  84.2,67.18 0 top
U$221  [3V36]  91.82,56.9 0 top
U$222  [3V36]  96.52,56.9 0 bottom
U$223  [NANO1]  91.57,60.71 0 bottom
U$224  [QWIIC_SHIELD1]  93.98,59.18 0 bottom
U$225  [3V31]  83.57,77.22 0 top
U$226  [5V0]  89.54,77.22 0 top
U$227  [5V0]  96.52,82.3 0 bottom
U$228  [5V1]  92.84,82.3 0 top
U$229  [QWIIC_SHIELD1]  102.11,59.18 0 top
U$230  [NANO1]  104.52,60.71 0 top
U$231  [A4#SDA5]  114.81,72.14 0 bottom
U$232  [A5#SCL4]  114.81,74.68 0 bottom
U$233  [GND0]  99.57,82.3 0 top
U$234  [GND0]  109.98,87.38 0 top
U$235  [GND0]  114.81,87.38 0 bottom
U$236  [GND0]  104.39,82.3 0 bottom
U$237  [A45]  111.12,72.14 0 top
U$238  [A56]  111.12,74.68 0 top
U$239  [I2C6]  102.49,67.18 0 top
U$240  [3V36]  110.11,56.9 0 top
U$241  [3V36]  114.81,56.9 0 bottom
U$242  [NANO1]  109.86,60.71 0 bottom
U$243  [QWIIC_SHIELD1]  112.27,59.18 0 bottom
U$244  [3V31]  101.85,77.22 0 top
U$245  [5V0]  107.82,77.22 0 top
U$246  [5V0]  114.81,82.3 0 bottom
U$247  [5V1]  111.12,82.3 0 top
U$248  [QWIIC_SHIELD1]  120.4,59.18 0 top
U$249  [NANO1]  122.81,60.71 0 top
U$250  [A4#SDA5]  133.1,72.14 0 bottom
U$251  [A5#SCL4]  133.1,74.68 0 bottom
U$252  [GND0]  117.86,82.3 0 top
U$253  [GND0]  128.27,87.38 0 top
U$254  [GND0]  133.1,87.38 0 bottom
U$255  [GND0]  122.68,82.3 0 bottom
U$256  [A45]  129.41,72.14 0 top
U$257  [A56]  129.41,74.68 0 top
U$258  [I2C6]  120.78,67.18 0 top
U$259  [3V36]  128.4,56.9 0 top
U$260  [3V36]  133.1,56.9 0 bottom
U$261  [NANO1]  128.14,60.71 0 bottom
U$262  [QWIIC_SHIELD1]  130.56,59.18 0 bottom
U$263  [3V31]  120.14,77.22 0 top
U$264  [5V0]  126.11,77.22 0 top
U$265  [5V0]  133.1,82.3 0 bottom
U$266  [5V1]  129.41,82.3 0 top
U$267  [QWIIC_SHIELD1]  10.67,102.87 0 top
U$268  [NANO1]  13.08,104.39 0 top
U$269  [A4#SDA5]  23.37,115.82 0 bottom
U$270  [A5#SCL4]  23.37,118.36 0 bottom
U$271  [GND0]  8.13,125.98 0 top
U$272  [GND0]  18.54,131.06 0 top
U$273  [GND0]  23.37,131.06 0 bottom
U$274  [GND0]  12.95,125.98 0 bottom
U$275  [A45]  19.68,115.82 0 top
U$276  [A56]  19.68,118.36 0 top
U$277  [I2C6]  11.05,110.87 0 top
U$278  [3V36]  18.67,100.58 0 top
U$279  [3V36]  23.37,100.58 0 bottom
U$280  [NANO1]  18.41,104.39 0 bottom
U$281  [QWIIC_SHIELD1]  20.83,102.87 0 bottom
U$282  [3V31]  10.41,120.9 0 top
U$283  [5V0]  16.38,120.9 0 top
U$284  [5V0]  23.37,125.98 0 bottom
U$285  [5V1]  19.68,125.98 0 top
U$286  [QWIIC_SHIELD1]  28.96,102.87 0 top
U$287  [NANO1]  31.37,104.39 0 top
U$288  [A4#SDA5]  41.66,115.82 0 bottom
U$289  [A5#SCL4]  41.66,118.36 0 bottom
U$290  [GND0]  26.42,125.98 0 top
U$291  [GND0]  36.83,131.06 0 top
U$292  [GND0]  41.66,131.06 0 bottom
U$293  [GND0]  31.24,125.98 0 bottom
U$294  [A45]  37.97,115.82 0 top
U$295  [A56]  37.97,118.36 0 top
U$296  [I2C6]  29.34,110.87 0 top
U$297  [3V36]  36.96,100.58 0 top
U$298  [3V36]  41.66,100.58 0 bottom
U$299  [NANO1]  36.7,104.39 0 bottom
U$300  [QWIIC_SHIELD1]  39.12,102.87 0 bottom
U$301  [3V31]  28.7,120.9 0 top
U$302  [5V0]  34.67,120.9 0 top
U$303  [5V0]  41.66,125.98 0 bottom
U$304  [5V1]  37.97,125.98 0 top
U$305  [QWIIC_SHIELD1]  47.24,102.87 0 top
U$306  [NANO1]  49.66,104.39 0 top
U$307  [A4#SDA5]  59.94,115.82 0 bottom
U$308  [A5#SCL4]  59.94,118.36 0 bottom
U$309  [GND0]  44.7,125.98 0 top
U$310  [GND0]  55.12,131.06 0 top
U$311  [GND0]  59.94,131.06 0 bottom
U$312  [GND0]  49.53,125.98 0 bottom
U$313  [A45]  56.26,115.82 0 top
U$314  [A56]  56.26,118.36 0 top
U$315  [I2C6]  47.62,110.87 0 top
U$316  [3V36]  55.24,100.58 0 top
U$317  [3V36]  59.94,100.58 0 bottom
U$318  [NANO1]  54.99,104.39 0 bottom
U$319  [QWIIC_SHIELD1]  57.4,102.87 0 bottom
U$320  [3V31]  46.99,120.9 0 top
U$321  [5V0]  52.96,120.9 0 top
U$322  [5V0]  59.94,125.98 0 bottom
U$323  [5V1]  56.26,125.98 0 top
U$324  [QWIIC_SHIELD1]  65.53,102.87 0 top
U$325  [NANO1]  67.95,104.39 0 top
U$326  [A4#SDA5]  78.23,115.82 0 bottom
U$327  [A5#SCL4]  78.23,118.36 0 bottom
U$328  [GND0]  62.99,125.98 0 top
U$329  [GND0]  73.41,131.06 0 top
U$330  [GND0]  78.23,131.06 0 bottom
U$331  [GND0]  67.82,125.98 0 bottom
U$332  [A45]  74.55,115.82 0 top
U$333  [A56]  74.55,118.36 0 top
U$334  [I2C6]  65.91,110.87 0 top
U$335  [3V36]  73.53,100.58 0 top
U$336  [3V36]  78.23,100.58 0 bottom
U$337  [NANO1]  73.28,104.39 0 bottom
U$338  [QWIIC_SHIELD1]  75.69,102.87 0 bottom
U$339  [3V31]  65.28,120.9 0 top
U$340  [5V0]  71.25,120.9 0 top
U$341  [5V0]  78.23,125.98 0 bottom
U$342  [5V1]  74.55,125.98 0 top
U$343  [QWIIC_SHIELD1]  83.82,102.87 0 top
U$344  [NANO1]  86.23,104.39 0 top
U$345  [A4#SDA5]  96.52,115.82 0 bottom
U$346  [A5#SCL4]  96.52,118.36 0 bottom
U$347  [GND0]  81.28,125.98 0 top
U$348  [GND0]  91.69,131.06 0 top
U$349  [GND0]  96.52,131.06 0 bottom
U$350  [GND0]  86.11,125.98 0 bottom
U$351  [A45]  92.84,115.82 0 top
U$352  [A56]  92.84,118.36 0 top
U$353  [I2C6]  84.2,110.87 0 top
U$354  [3V36]  91.82,100.58 0 top
U$355  [3V36]  96.52,100.58 0 bottom
U$356  [NANO1]  91.57,104.39 0 bottom
U$357  [QWIIC_SHIELD1]  93.98,102.87 0 bottom
U$358  [3V31]  83.57,120.9 0 top
U$359  [5V0]  89.54,120.9 0 top
U$360  [5V0]  96.52,125.98 0 bottom
U$361  [5V1]  92.84,125.98 0 top
U$362  [QWIIC_SHIELD1]  102.11,102.87 0 top
U$363  [NANO1]  104.52,104.39 0 top
U$364  [A4#SDA5]  114.81,115.82 0 bottom
U$365  [A5#SCL4]  114.81,118.36 0 bottom
U$366  [GND0]  99.57,125.98 0 top
U$367  [GND0]  109.98,131.06 0 top
U$368  [GND0]  114.81,131.06 0 bottom
U$369  [GND0]  104.39,125.98 0 bottom
U$370  [A45]  111.12,115.82 0 top
U$371  [A56]  111.12,118.36 0 top
U$372  [I2C6]  102.49,110.87 0 top